# Altium PCB TurboSpin.PcbDoc (part 1 of 3)
Units mm, origin at the board's own origin, x right, y up, seen from the top; angles counter-clockwise.
Board outline 70.29 x 70.31 mm, 4 copper layers (Top Layer, GND, Power, Bottom Layer), stack 0.603 mm thick; 151 components, 101 nets, 536 pads, 784 vias.
Unrouted connection lines stored in the file: 8.
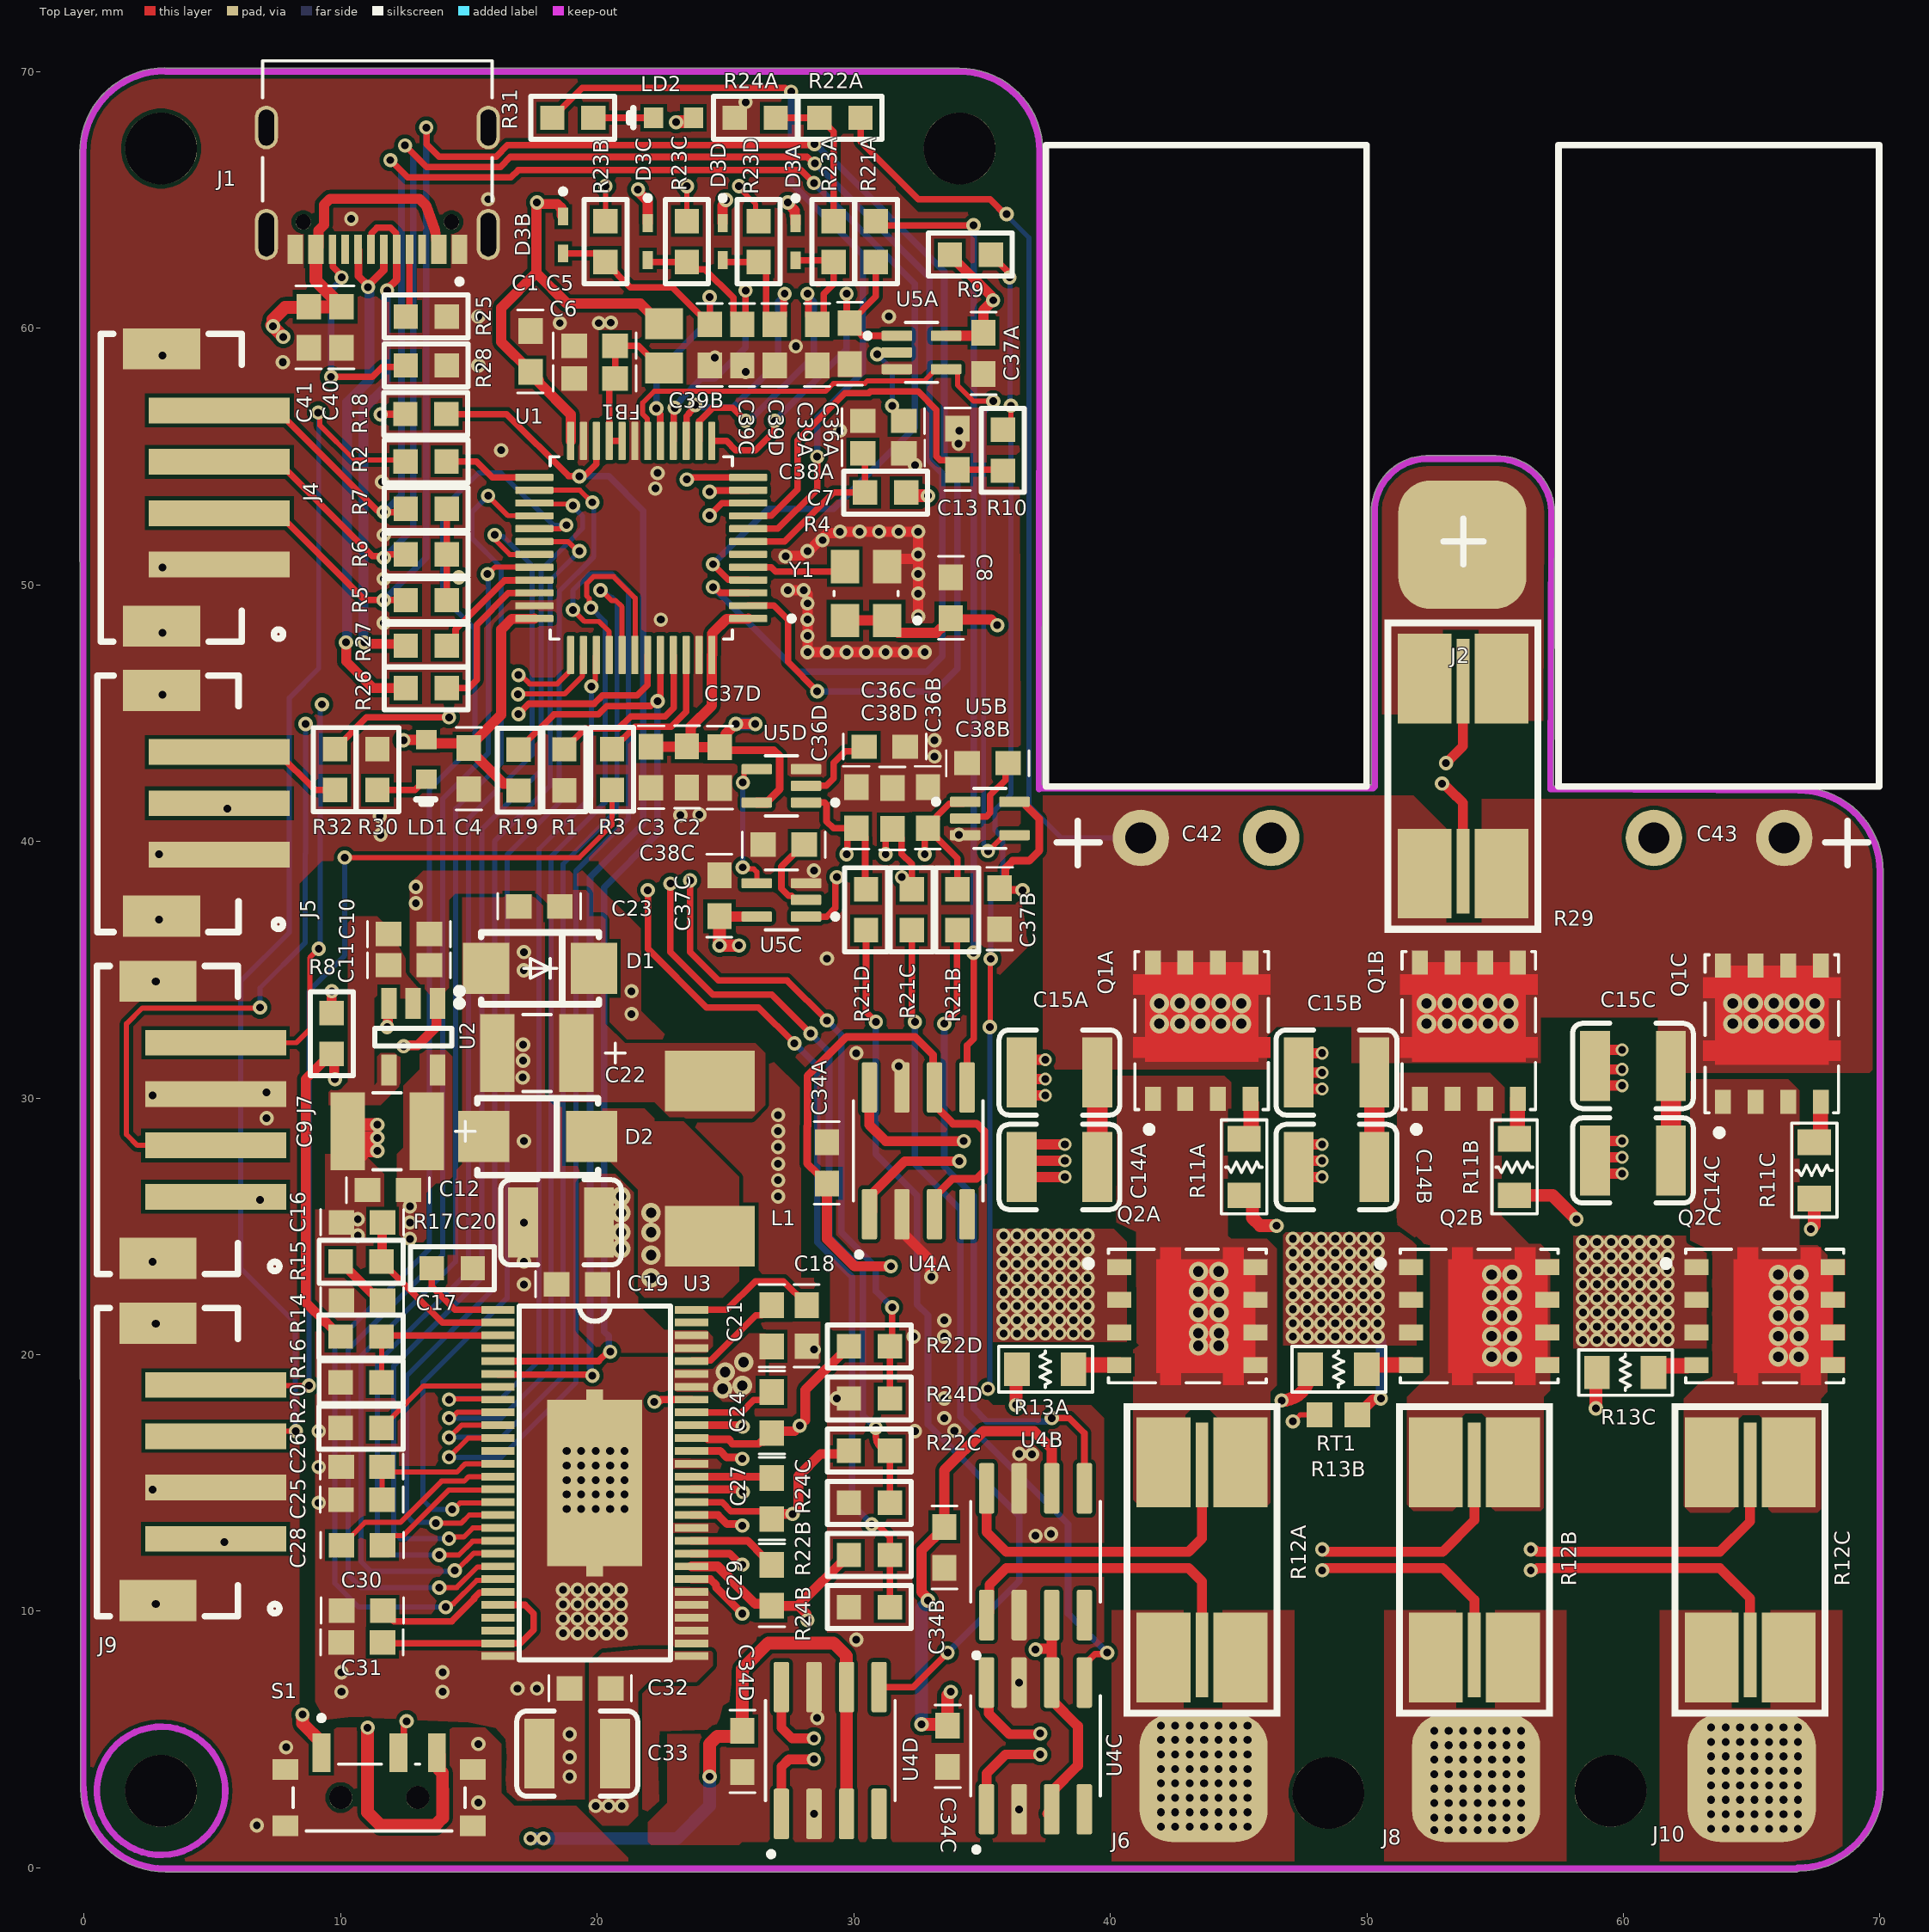
[diagram p0: Top Layer view]
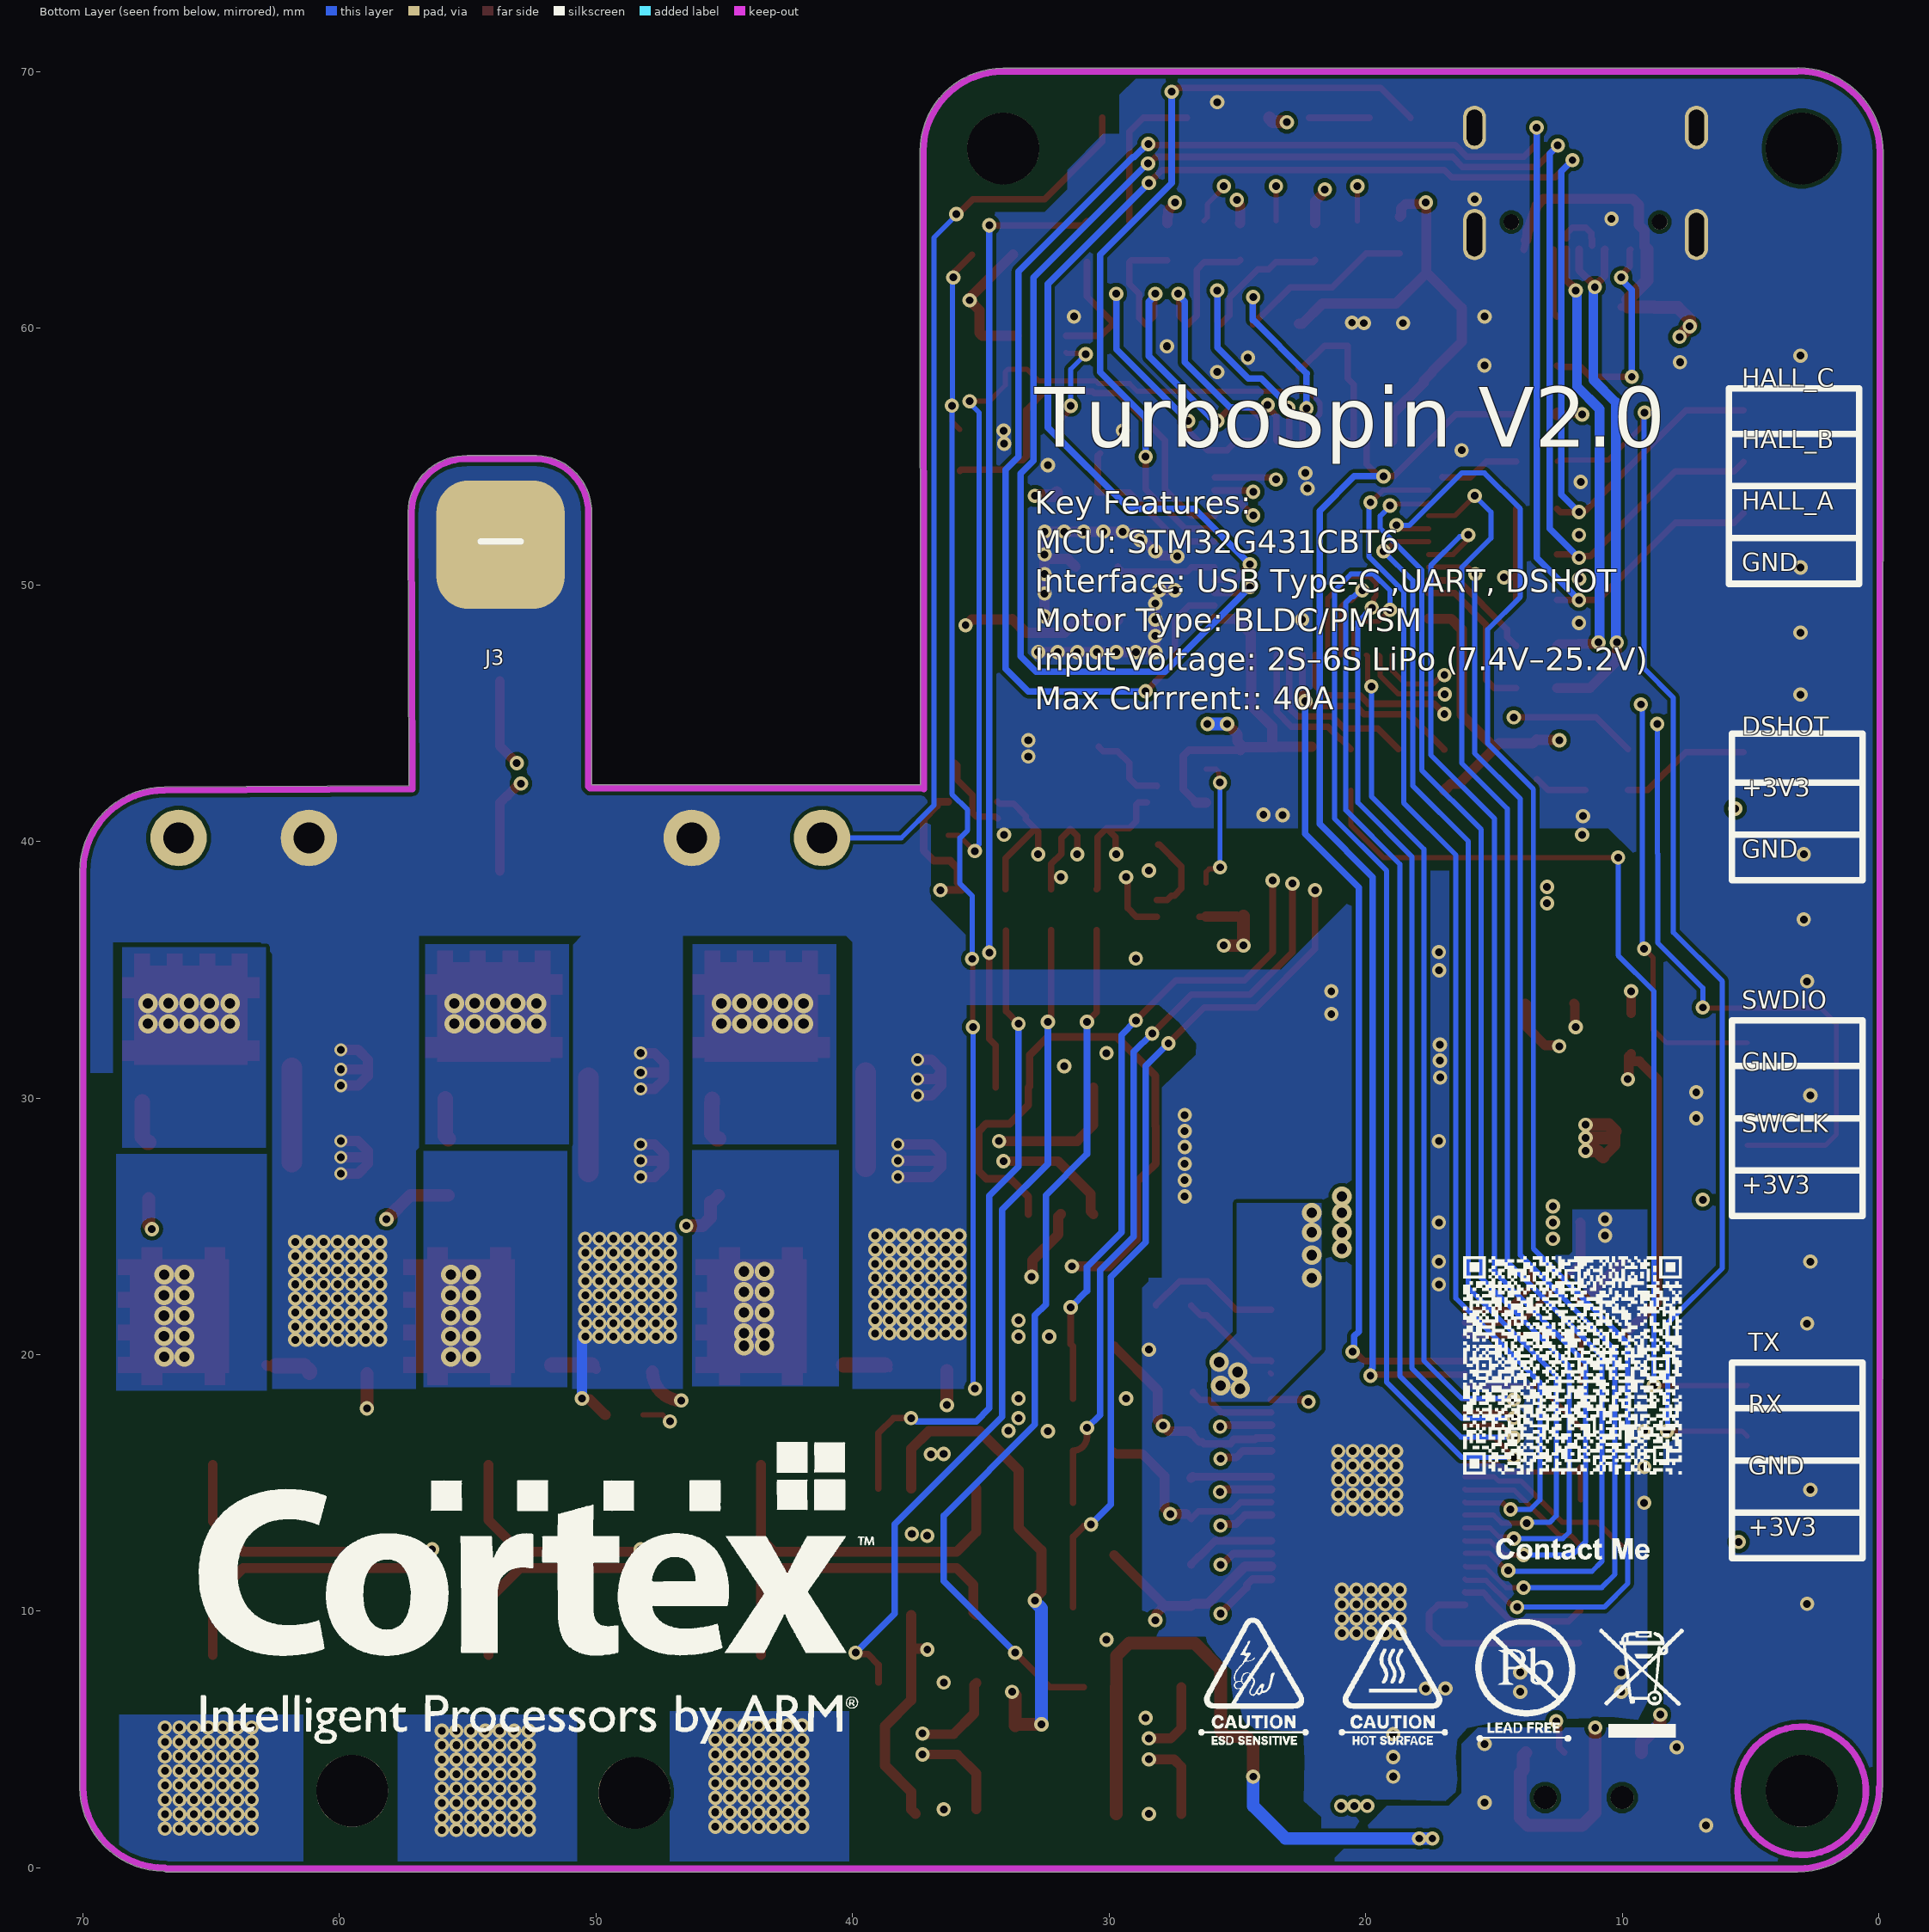
[diagram p1: Bottom Layer view, seen from below]
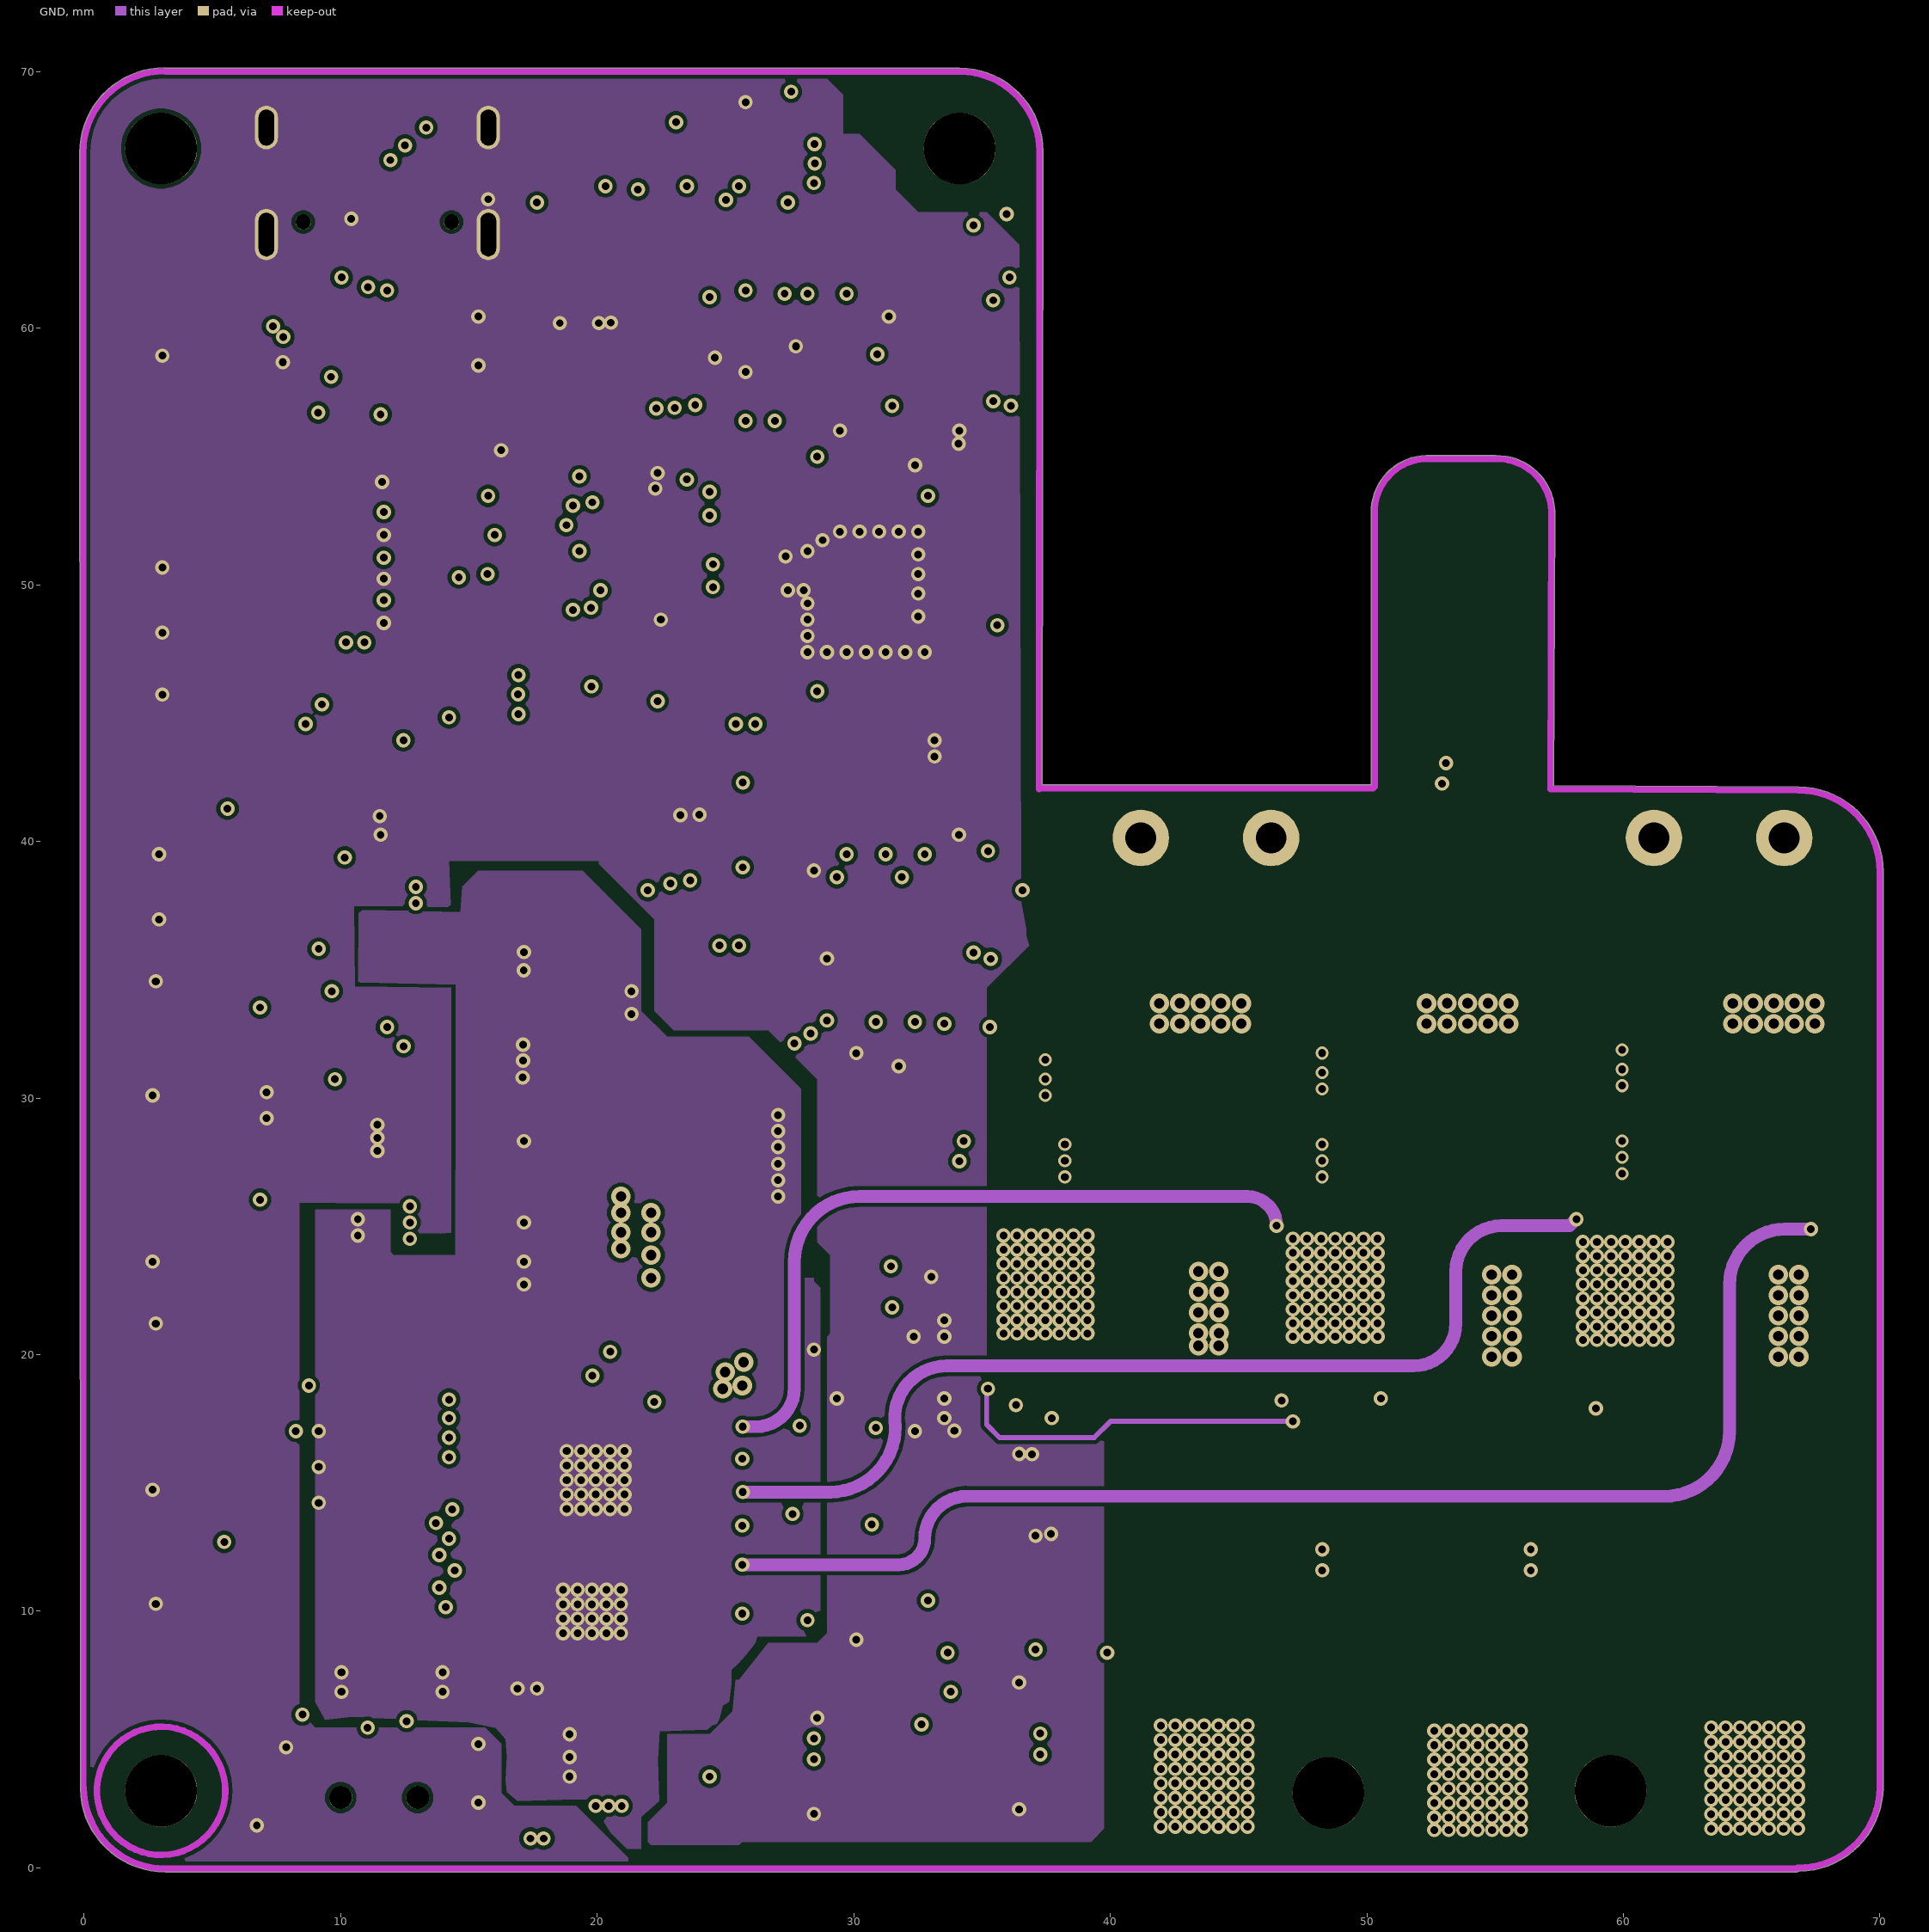
[diagram p2: GND]
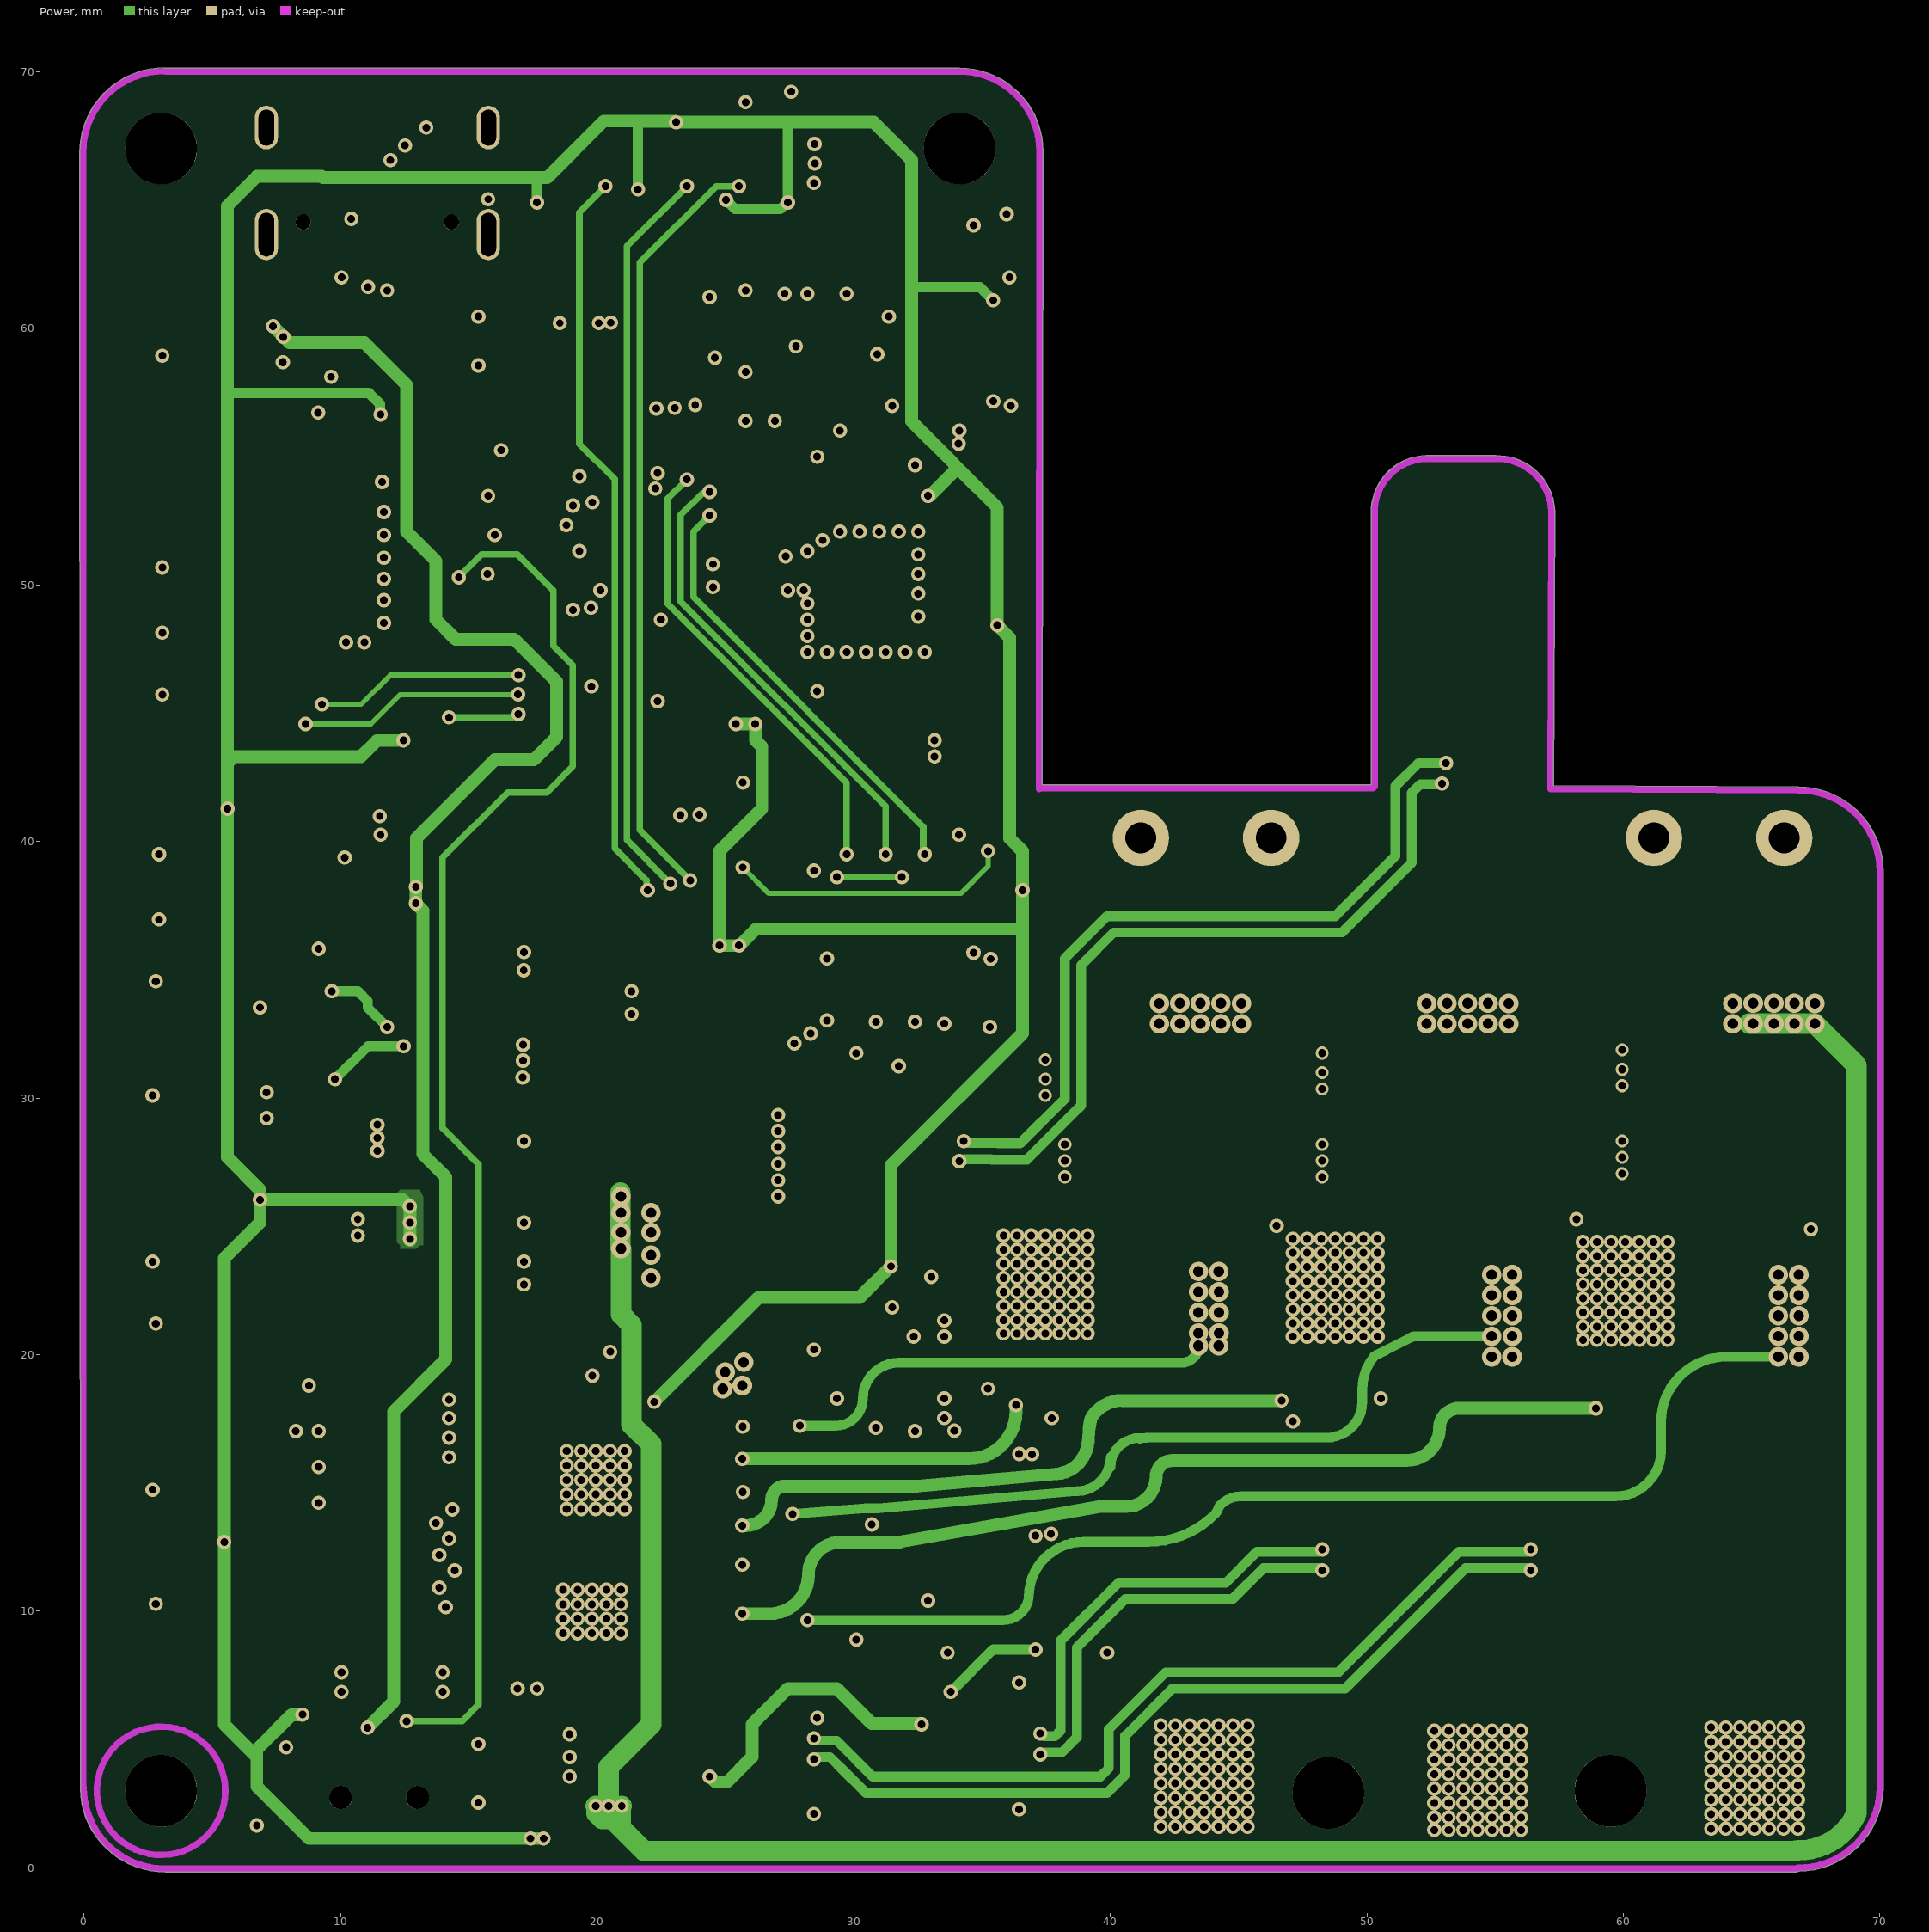
[diagram p3: Power]
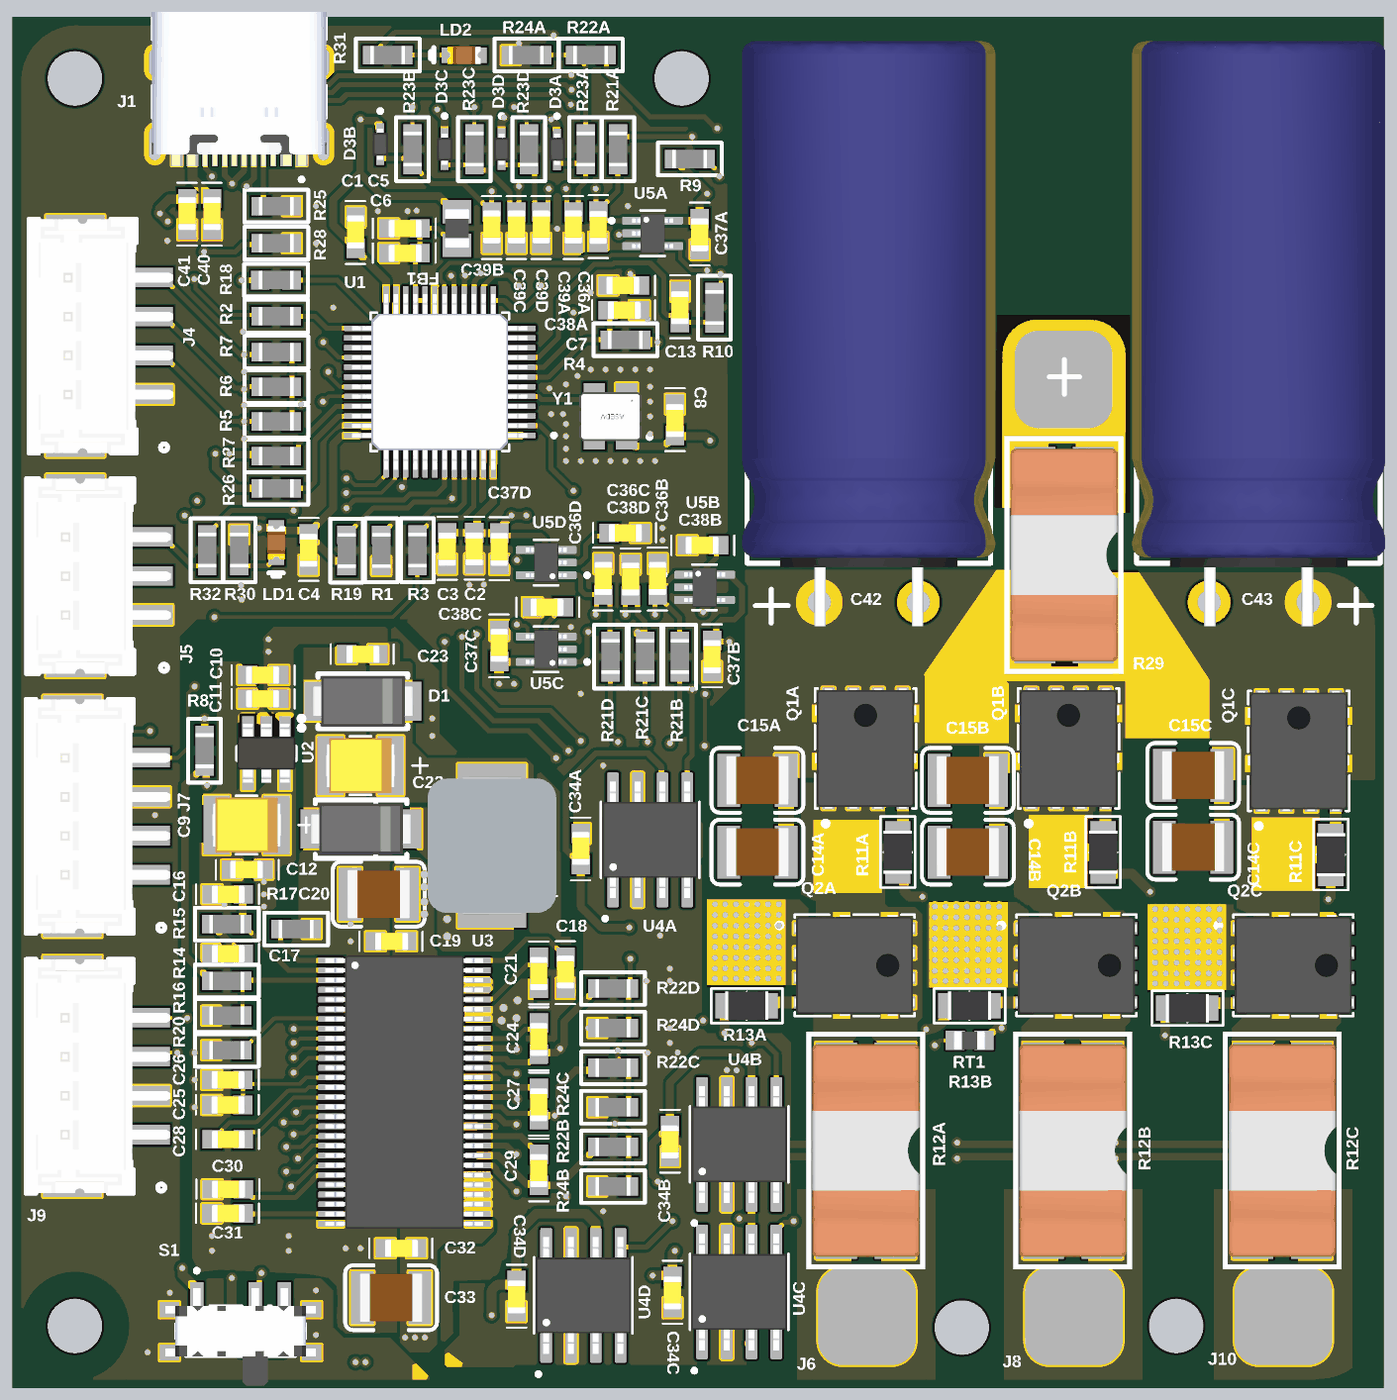
[diagram p5: 3D render of the assembled board from above, using the file's embedded part models]

## Layer stack, top to bottom
Top Solder: solder mask 0.0102, Solder Resist, Dk 3.5
Top Layer: signal copper 0.0356
Dielectric 2: prepreg 0.0711, PP-006, Dk 4.1
GND: signal copper 0.035
Dielectric 1: dielectric 0.32, FR-4, Dk 4.8
Power: signal copper 0.035
Dielectric 3: prepreg 0.0711, PP-006, Dk 4.1
Bottom Layer: signal copper 0.0356
Bottom Solder: solder mask 0.0102, Solder Resist, Dk 3.5

## Board outline
-0.143,3.087 ccw(c3.159,3.139) 3.159,-0.164 66.766,-0.164 66.855,-0.127 ccw(c66.827,3.165) 70.12,3.139 70.12,3.14 70.12,38.802 70.122,38.827 ccw(c66.825,38.823) 66.824,42.12 57.282,42.164 57.325,52.832 57.325,52.835 ccw(c55.076,52.784) 55.026,55.033 52.314,55.038 52.31,55.038 ccw(c52.369,52.843) 50.173,52.786 50.173,42.199 37.345,42.199 37.369,66.888 37.369,66.889 ccw(c34.129,66.889) 34.13,70.129 3.19,70.129 3.132,70.143 ccw(c3.132,66.841) -0.171,66.841

## Design rules (kind name [scope] priority, off if disabled: settings)
Clearance [All] p1: gap=0.152 ignorepadtopadclearanceinfootprint=FALSE
DiffPairsRouting [All] p1: maxlimit=0.254 minlimit=0.254 mostfreqgap=0.254 toplayer_minwidth=0.381 toplayer_maxwidth=0.381 toplayer_prefwidth=0.381 midlayer1_minwidth=0.381 midlayer1_maxwidth=0.381 midlayer1_prefwidth=0.381 midlayer2_minwidth=0.381 midlayer2_maxwidth=0.381 midlayer2_prefwidth=0.381 bottomlayer_minwidth=0.381 bottomlayer_maxwidth=0.381 bottomlayer_prefwidth=0.381 maxuncoupledlength=12.7
PlaneClearance [All] p1: clearance=0.5
PlaneConnect [All] p1: planeconnectstyle=Direct reliefexpansion=0.508 reliefentries=4 reliefconductorwidth=0.254 reliefairgap=0.254
PolygonConnect [All] p1: connectstyle=Direct reliefconductorwidth=0.254 reliefentries=4 polygonreliefangle="90 Angle" airgapwidth=0.254
RoutingVias [All] p1: holewidth=0.3 width=0.56 viastyle="Through Hole" minholewidth=0.3 minwidth=0.56 maxholewidth=3 maxwidth=3
SolderMaskExpansion [All] p1: expansion=0.102 istentingtop=FALSE
SupplyNets "Schematic Supply Nets" [InNet('INA_N')] p1: voltage=0.000
SupplyNets "Schematic Supply Nets_2" [InNet('GND')] p2: voltage=0.000
SupplyNets "Schematic Supply Nets_3" [InNet('+5V')] p3: voltage=0.000
SupplyNets "Schematic Supply Nets_1" [InNet('+3V3')] p4: voltage=0.000
Width [All] p1: maxlimit=4 minlimit=0.2 preferedwidth=0.2
27 further rules are at their usual default settings.

## Classes and differential pairs
channel class Mosfets: U_Mosfets_1 U_Mosfets_2 U_Mosfets_3
component class U_Mosfets_3: C14C C15C Q1C Q2C R11C R12C R13C
component class U_Mosfets_2: C14B C15B Q1B Q2B R11B R12B R13B
component class U_Current_Shunt_Amplifier4: C34D C36D C37D C38D R21D U4D U5D
component class U_Current_Shunt_Amplifier3: C34C C36C C37C C38C R21C U4C U5C
channel class voltage_filter: U_voltage_filter1 U_voltage_filter2 U_voltage_filter3 U_voltage_filter4
channel class Current_Shunt_Amplifier: U_Current_Shunt_Amplifier1 U_Current_Shunt_Amplifier2 U_Current_Shunt_Amplifier3 U_Current_Shunt_Amplifier4
net class WIRE[13..1]: WIRE1 WIRE2 WIRE3 WIRE4 WIRE5 WIRE6 WIRE7 WIRE8 WIRE9 WIRE10 WIRE11 WIRE12 WIRE13
component class U_voltage_filter4: C39D D3D R22D R23D R24D
component class U_voltage_filter3: C39C D3C R22C R23C R24C
component class U_voltage_filter2: C39B D3B R22B R23B R24B
component class U_voltage_filter1: C39A D3A R22A R23A R24A
component class U_USB_TYPE_C: C40 C41 J1 R25 R26 R27 R28
component class "U_Temperature Sensor": C13 R9 R10 RT1
component class U_Mosfets_1: C14A C15A Q1A Q2A R11A R12A R13A
component class U_Mosfet_Driver: C16 C17 C18 C19 C20 C21 C22 C23 C24 C25 C26 C27 C28 C29 C30 C31 C32 C33 D1 D2 L1 R14 R15 R16 R17 R18 R19 R20 U3
component class U_Mcu: C1 C2 C3 C4 C5 C6 C7 C8 FB1 R1 R2 R3 R4 R5 R6 R7 R32 S1 U1 Y1
component class U_Current_Shunt_Amplifier2: C34B C36B C37B C38B R21B U4B U5B
component class U_Current_Shunt_Amplifier1: C34A C36A C37A C38A R21A U4A U5A
component class U_Buck_and_LDO: C9 C10 C11 C12 R8 U2
component class TurboSpin: C42 C43 J2 J3 J4 J5 J6 J7 J8 J9 J10 LD1 LD2 R29 R30 R31
differential pair IND: +IND_P -IND_N
differential pair INC: +INC_P -INC_N
differential pair INB: +INB_P -INB_N
differential pair INA: +INA_P -INA_N
differential pair D: +D_P -D_N

## Components (designator, comment, footprint, x,y, rotation, side; value= is the part's Value field where it differs from the comment)
C1 "100nF 16V 0603 20%" C_0603 17.399,58.293 r90 top
C2 "100nF 16V 0603 20%" C_0603 23.492,43.7 r270 top
C3 "100nF 16V 0603 20%" C_0603 22.098,43.688 r270 top
C4 "100nF 16V 0603 20%" C_0603 14.986,43.637 r270 top
C5 "2.2uF 16V 0603 20%" C_0603 19.101,59.309 r0 top
C6 "100nF 16V 0603 20%" C_0603 19.101,58.039 r0 top
C7 "100nF 16V 0603 20%" C_0603 30.353,55.118 r0 top
C8 "10nF 16V 0603 20%" C_0603 33.782,50.292 r270 top
C9 "100uF 6.3V 3528 10%" CAPPC3528X210N 11.811,28.702 r180 top
C10 "10uF 16V 0603 20%" C_0603 13.463,36.396 r180 top
C11 "100nF 50V 0603 20%" C_0603 13.462,35.179 r180 top
C12 "100nF 16V 0603 20%" C_0603 12.643,26.414 r180 top
C13 "100nF 16V 0603 20%" C_0603 34.036,56.083 r270 top
C14A "4.7uF 100V 1210 20%" C_1210 37.973,27.178 r0 top (schematic designator C14)
C14B "4.7uF 100V 1210 20%" C_1210 48.768,27.178 r0 top (schematic designator C14)
C14C "4.7uF 100V 1210 20%" C_1210 60.325,27.432 r0 top (schematic designator C14)
C15A "4.7uF 100V 1210 20%" C_1210 37.973,30.861 r0 top (schematic designator C15)
C15B "4.7uF 100V 1210 20%" C_1210 48.768,30.861 r0 top (schematic designator C15)
C15C "4.7uF 100V 1210 20%" C_1210 60.325,31.115 r0 top (schematic designator C15)
C16 "120pF 50V 0603 20%" C_0603 10.033,25.146 r0 top
C17 "6.8nF 50V 0603 20%" C_0603 10.033,22.098 r0 top
C18 "15nF 50V 0603 20%" C_0603 28.168,20.324 r90 top
C19 "100nF 100V 0603 20%" C_0603 18.415,22.733 r0 top
C20 "4.7uF 100V 1210 20%" C_1210 18.542,25.019 r0 top
C21 "100nF 50V 0603 20%" C_0603 26.797,21.92 r270 top
C22 "100uF 6.3V 3528 10%" CAPPC3528X210N 17.653,31.75 r180 top
C23 "2.2uF 16V 0603 20%" C_0603 16.942,37.465 r0 top
C24 "100nF 50V 0603 20%" C_0603 26.797,18.542 r270 top
C25 "2.2uF 16V 0603 20%" C_0603 10.017,14.343 r0 top
C26 "2.2uF 16V 0603 20%" C_0603 10.021,15.626 r0 top
C27 "100nF 50V 0603 20%" C_0603 26.797,15.189 r270 top
C28 "22nF 16V 0603 20%" C_0603 10.033,12.573 r0 top
C29 "100nF 50V 0603 20%" C_0603 26.797,11.811 r270 top
C30 "1uF 16V 0603 20%" C_0603 10.043,10.017 r0 top
C31 "1uF 16V 0603 20%" C_0603 10.028,8.777 r0 top
C32 "100nF 100V 0603 20%" C_0603 18.923,6.985 r0 top
C33 "4.7uF 100V 1210 20%" C_1210 19.177,4.318 r0 top
C34A "2.2uF 16V 0603 20%" C_0603 28.956,26.67 r90 top (schematic designator C34)
C34B "2.2uF 16V 0603 20%" C_0603 33.528,13.284 r270 top (schematic designator C34)
C34C "2.2uF 16V 0603 20%" C_0603 33.655,5.537 r270 top (schematic designator C34)
C34D "2.2uF 16V 0603 20%" C_0603 25.654,5.334 r270 top (schematic designator C34)
C36A "1nF 16V 0603 20%" C_0603 29.845,60.198 r270 top (schematic designator C36)
C36B "1nF 16V 0603 20%" C_0603 32.893,40.513 r90 top (schematic designator C36)
C36C "1nF 16V 0603 20%" C_0603 31.514,40.483 r90 top (schematic designator C36)
C36D "1nF 16V 0603 20%" C_0603 30.099,40.513 r90 top (schematic designator C36)
C37A "2.2uF 16V 0603 20%" C_0603 35.052,59.817 r270 top (schematic designator C37)
C37B "2.2uF 16V 0603 20%" C_0603 35.687,38.176 r270 top (schematic designator C37)
C37C "2.2uF 16V 0603 20%" C_0603 24.765,37.084 r90 top (schematic designator C37)
C37D "2.2uF 16V 0603 20%" C_0603 24.771,43.675 r270 top (schematic designator C37)
C38A "15nF 16V 0603 20%" C_0603 31.953,56.388 r180 top (schematic designator C38)
C38B "15nF 16V 0603 20%" C_0603 36.017,43.053 r180 top (schematic designator C38)
C38C "15nF 16V 0603 20%" C_0603 28.067,39.878 r180 top (schematic designator C38)
C38D "15nF 16V 0603 20%" C_0603 30.404,43.688 r0 top (schematic designator C38)
C39A "1nF 16V 0603 20%" C_0603 28.575,58.547 r90 top (schematic designator C39)
C39B "1nF 16V 0603 20%" C_0603 24.384,58.547 r90 top (schematic designator C39)
C39C "1nF 16V 0603 20%" C_0603 25.654,58.547 r90 top (schematic designator C39)
C39D "1nF 16V 0603 20%" C_0603 26.924,58.547 r90 top (schematic designator C39)
C40 "10uF 16V 0603 20%" C_0603 10.033,59.233 r90 top
C41 "100nF 16V 0603 20%" C_0603 8.763,59.233 r90 top
C42 "1000uF 100V 20%" C_RADIAL 43.738,40.135 r0 top
C43 "1000uF 100V 20%" C_RADIAL 63.718,40.135 r180 top
D1 "SMAJ5.0A_C353442" SMAJ5.0A 17.78,35.052 r0 top
D2 "SS36" SS54 17.653,28.321 r0 top
D3A "BAT54K" SODFL1608X70N 27.732,63.365 r270 top (schematic designator D3)
D3B "BAT54K" SODFL1608X70N 18.669,63.627 r270 top (schematic designator D3)
D3C "BAT54K" SODFL1608X70N 21.971,63.373 r270 top (schematic designator D3)
D3D "BAT54K" SODFL1608X70N 24.892,63.373 r270 top (schematic designator D3)
FB1 "MPZ2012S601ATD25" BEADC2012X105N 22.606,59.309 r90 top
J1 "TYPE-C-31-M-12" HRO_TYPE-C-31-M-12 11.43,67.818 r180 top
J2 "Connector>>B1B" CN_1P_PAD#1 53.721,49.099 r0 top
J3 "Connector>>B1B" CN_1P_PAD#2 53.721,51.562 r180 bottom
J4 "Connector>>B5B-XH-A" CN_HDGC2001WV-S-4 4.445,53.721 r0 top
J5 "Connector>>B4B-XH-A" CN_HDGC2001WV-S-3 5.27,41.484 r0 top
J6 "Connector>>B1B" CN_1P_PAD#2 43.635,3.5 r0 top
J7 "Connector>>B5B-XH-A" CN_HDGC2001WV-S-4 4.3,29.083 r0 top
J8 "Connector>>B1B" CN_1P_PAD#2 54.254,3.5 r0 top
J9 "Connector>>B5B-XH-A" CN_HDGC2001WV-S-4 4.3,15.748 r0 top
J10 "Connector>>B1B" CN_1P_PAD#2 65,3.5 r0 top
L1 "22uH 7*6.6mm" Inductor_SMD_7*6.6mm_22uH 24.396,27.639 r90 top
LD1 "1.8Vf  25mA  5mW" LED_0603_red 13.335,43.968 r270 top
LD2 "1.8Vf  25mA  5mW" LED_0603_red 23.749,68.199 r180 top
Q1A "TPH1R204PL1" TRANS_STL60P4LLF6 43.561,32.627 r90 top (schematic designator Q1)
Q1B "TPH1R204PL1" TRANS_STL60P4LLF6 53.975,32.627 r90 top (schematic designator Q1)
Q1C "TPH1R204PL1" TRANS_STL60P4LLF6 65.786,32.5 r90 top (schematic designator Q1)
Q2A "TPH1R204PL1" TRANS_STL60P4LLF6 43,21.5 r0 top (schematic designator Q2)
Q2B "TPH1R204PL1" TRANS_STL60P4LLF6 54.381,21.5 r0 top (schematic designator Q2)
Q2C "TPH1R204PL1" TRANS_STL60P4LLF6 65.508,21.5 r0 top (schematic designator Q2)
R1 "10K 0603 1%" R_0603 18.717,42.79 r270 top
R2 "100R 0603 1%" R_0603 13.327,54.81 r180 top
R3 "100R 0603 1%" R_0603 20.576,42.801 r270 top
R4 "10K 0603 1%" R_0603 31.242,53.594 r180 top
R5 "10K 0603 1%" R_0603 13.335,49.403 r180 top
R6 "10K 0603 1%" R_0603 13.335,51.181 r180 top
R7 "10K 0603 1%" R_0603 13.335,52.959 r180 top
R8 "10K 0603 1%" R_0603 9.652,32.512 r90 top
R9 "10K 0603 1%" R_0603 34.544,62.865 r0 top
R10 "100R 0603 1%" R_0603 35.814,55.245 r270 top
R11A "4.7R 0805 1%" R_0805 45.212,27.305 r90 top (schematic designator R11)
R11B "4.7R 0805 1%" R_0805 55.753,27.305 r90 top (schematic designator R11)
R11C "4.7R 0805 1%" R_0805 67.437,27.178 r90 top (schematic designator R11)
R12A "0.001R 3920 1%" R_3920 43.635,12 r0 top (schematic designator R12)
R12B "0.001R 3920 1%" R_3920 54.254,12 r0 top (schematic designator R12)
R12C "0.001R 3920 1%" R_3920 65,12 r0 top (schematic designator R12)
R13A "4.7R 0805 1%" R_0805 37.465,19.431 r0 top (schematic designator R13)
R13B "4.7R 0805 1%" R_0805 48.895,19.431 r0 top (schematic designator R13)
R13C "4.7R 0805 1%" R_0805 60.071,19.304 r0 top (schematic designator R13)
R14 "52.3K 0603 1%" R_0603 10.795,20.701 r0 top
R15 "16.2K 0603 1%" R_0603 10.795,23.622 r180 top
R16 "10K 0603 1%" R_0603 10.795,18.923 r180 top
R17 "200K 0603 1%" R_0603 14.351,23.368 r180 top
R18 "10K 0603 1%" R_0603 13.321,56.653 r180 top
R19 "10K 0603 1%" R_0603 16.938,42.778 r270 top
R20 "1R 0603 1%" R_0603 10.795,17.145 r0 top
R21A "1K 0603 1%" R_0603 30.861,63.373 r270 top (schematic designator R21)
R21B "1K 0603 1%" R_0603 34.036,37.338 r90 top (schematic designator R21)
R21C "1K 0603 1%" R_0603 32.258,37.338 r90 top (schematic designator R21)
R21D "1K 0603 1%" R_0603 30.48,37.338 r90 top (schematic designator R21)
R22A "120K 0603 1%" R_0603 29.464,68.199 r180 top (schematic designator R22)
R22B "120K 0603 1%" R_0603 30.607,12.192 r0 top (schematic designator R22)
R22C "120K 0603 1%" R_0603 30.607,16.256 r0 top (schematic designator R22)
R22D "120K 0603 1%" R_0603 30.607,20.32 r0 top (schematic designator R22)
R23A "100R 0603 1%" R_0603 29.21,63.373 r270 top (schematic designator R23)
R23B "100R 0603 1%" R_0603 20.32,63.373 r270 top (schematic designator R23)
R23C "100R 0603 1%" R_0603 23.495,63.373 r270 top (schematic designator R23)
R23D "100R 0603 1%" R_0603 26.289,63.373 r270 top (schematic designator R23)
R24A "10K 0603 1%" R_0603 26.162,68.199 r180 top (schematic designator R24)
R24B "10K 0603 1%" R_0603 30.607,10.16 r180 top (schematic designator R24)
R24C "10K 0603 1%" R_0603 30.607,14.224 r180 top (schematic designator R24)
R24D "10K 0603 1%" R_0603 30.607,18.288 r180 top (schematic designator R24)
R25 "5.1K 0603 1%" R_0603 13.335,60.452 r0 top
R26 "22R 0603 1%" R_0603 13.335,45.974 r0 top
R27 "22R 0603 1%" R_0603 13.335,47.625 r0 top
R28 "5.1K 0603 1%" R_0603 13.335,58.547 r0 top
R29 "0.001R 3920 1%" R_3920 53.809,42.545 r0 top
R30 "1K 0603 1%" R_0603 11.43,42.799 r90 top
R31 "1K 0603 1%" R_0603 19.05,68.199 r180 top
R32 "47R 0603 1%" R_0603 9.779,42.799 r90 top
RT1 "NCP18XH103F03RB" THRMC1608X95N 48.895,17.653 r180 top
S1 "SW_SSSS811101" SW_SSSS811101 11.5,2.738 r0 top
U1 "STM32G431CBT6" QFP50P900X900X160-48N 21.717,51.435 r180 top
U2 "RY6212 3V3 SOT23-5" "RY6212 SOT23-5" 12.827,32.385 r270 top
U3 "DRV8301DCAR" TSSOP-56_3 19.904,14.998 r0 top
U4A "INA240A1D" SOIC127P599X175-8N 32.512,27.94 r90 top (schematic designator U4)
U4B "INA240A1D" SOIC127P599X175-8N 37.084,12.319 r90 top (schematic designator U4)
U4C "INA240A1D" SOIC127P599X175-8N 37.081,4.751 r90 top (schematic designator U4)
U4D "INA240A1D" SOIC127P599X175-8N 29.083,4.572 r90 top (schematic designator U4)
U5A "SW>>SN74LVC1G66DCKR" SOT65P210X110-5N 32.639,59.055 r0 top (schematic designator U5)
U5B "SW>>SN74LVC1G66DCKR" SOT65P210X110-5N 35.306,40.894 r0 top (schematic designator U5)
U5C "SW>>SN74LVC1G66DCKR" SOT65P210X110-5N 27.178,37.719 r180 top (schematic designator U5)
U5D "SW>>SN74LVC1G66DCKR" SOT65P210X110-5N 27.178,42.164 r180 top (schematic designator U5)
Y1 "8Mhz Oscillator (TFOM8M4RHKCNT2T)" XTAL_ASE-8.000MHZ-LC-T 30.48,49.657 r180 top

## Footprints (in the part's own frame and the unit in brackets; to place one, negate y for a bottom-side part, rotate by r counter-clockwise, add the part's x,y. Pads: shape width x height; smd on the part's side, far side on the other; paste and mask are expansions set on the pad)
BEADC2012X105N [mm]
  rect 1.2x1.47 smd: 1(-0.86,0) 2(0.86,0)
  body extent -1,-0.63 1,0.63, height 1.05
C_0603 [mm]
  rect 1x0.95 smd: 1(0,0) 2(1.6,0)
  silkscreen extent -0.81,-0.49 2.41,0.51, body extent -0.01,-0.45 1.69,0.45, height 0.8
C_1210 [mm]
  rect 1.16x2.72 smd: 1(-1.431,0.134) 2(1.519,0.134)
  silkscreen extent -2.31,-1.53 2.4,1.79, body extent -1.56,-1.12 1.64,1.38, height 1.3
C_RADIAL [mm]
  round 2.2 hole 1.2: 1(-2.55,0) 2(2.53,0)
  silkscreen extent -6.25,-1.07 6.25,27, body extent -6.51,-1.22 6.49,28.78, height 6.5
CAPPC3528X210N [mm]
  rect 1.34x3.02 smd paste+0 mask+0.102: 1(-1.54,0) 2(1.54,0)
  silkscreen extent -3.43,-1.5 0.55,1.5, body extent -1.75,-1.4 1.75,1.4, height 2.1
CN_1P_PAD#1 [mm]
  rrect50% 5x5 smd: 1(0,2.463)
CN_1P_PAD#2 [mm]
  rrect50% 5x5 smd: 1(0,0)
CN_HDGC2001WV-S-3 [mm]
  rect 5.5x1 smd: 1(0,-2) 2(0,0) 3(0,2)
  rect 3x1.6 smd: 4(-2.25,-4.4) 4(-2.25,4.4)
  silkscreen extent -4.75,-5.02 2.48,4.98, body extent -4.75,-5.02 2.65,4.98, height 6.5
CN_HDGC2001WV-S-4 [mm]
  rect 5.5x1 smd: 1(0.826,-2.93) 2(0.826,-0.93) 3(0.826,1.07) 4(0.826,3.07)
  rect 3x1.6 smd: 5(-1.424,-5.33) 5(-1.424,5.47)
  silkscreen extent -3.8,-5.94 3.31,6.06, body extent -3.8,-5.94 3.6,6.06, height 6.5
HRO_TYPE-C-31-M-12 [mm]
  rect 0.6x1.14 smd mask+0.05: A1_B12(-3.2,4.75) A4_B9(-2.4,4.75) B1_A12(3.2,4.75) B4_A9(2.4,4.75)
  rect 0.3x1.14 smd mask+0.05: A5(-1.25,4.75) A6(-0.25,4.75) A7(0.25,4.75) A8(1.25,4.75) B5(1.75,4.75) B6(0.75,4.75) B7(-0.75,4.75) B8(-1.75,4.75)
  oval 0.9x2 hole 0.6 slot 1.7 at 90 deg: S1(-4.325,4.17) S2(4.325,4.17)
  oval 0.9x1.7 hole 0.6 slot 1.4 at 90 deg: S3(-4.325,0) S4(4.325,0)
  round 0.6 hole 0.6 unplated: ""(-2.89,3.68) ""(2.89,3.68)
  silkscreen extent -4.47,-2.6 4.47,6.1, body extent -4.47,-2.6 4.47,5.31, height 3.31
Inductor_SMD_7*6.6mm_22uH [mm] "Inductor CD31-4R7M"
  rect 2.35x3.5 smd: 1(-3.025,0) 2(3.025,0)
  body extent -3.55,-3.3 3.55,3.3, height 3
LED_0603_red [mm]
  rect 0.75x0.8 smd: 1(0,0) 2(1.55,0)
  silkscreen extent 2.34,-0.38 2.5,0.36, body extent -0.06,-0.45 1.64,0.45, height 0.9
QFP50P900X900X160-48N [mm]
  rrect25% 1.49x0.28 smd: 1(-4.17,2.75) 2(-4.17,2.25) 3(-4.17,1.75) 4(-4.17,1.25) 5(-4.17,0.75) 6(-4.17,0.25) 7(-4.17,-0.25) 8(-4.17,-0.75) 9(-4.17,-1.25) 10(-4.17,-1.75) 11(-4.17,-2.25) 12(-4.17,-2.75) 25(4.17,-2.75) 26(4.17,-2.25) 27(4.17,-1.75) 28(4.17,-1.25) 29(4.17,-0.75) 30(4.17,-0.25) 31(4.17,0.25) 32(4.17,0.75) 33(4.17,1.25) 34(4.17,1.75) 35(4.17,2.25) 36(4.17,2.75)
  rrect25% 0.28x1.49 smd: 13(-2.75,-4.17) 14(-2.25,-4.17) 15(-1.75,-4.17) 16(-1.25,-4.17) 17(-0.75,-4.17) 18(-0.25,-4.17) 19(0.25,-4.17) 20(0.75,-4.17) 21(1.25,-4.17) 22(1.75,-4.17) 23(2.25,-4.17) 24(2.75,-4.17) 37(2.75,4.17) 38(2.25,4.17) 39(1.75,4.17) 40(1.25,4.17) 41(0.75,4.17) 42(0.25,4.17) 43(-0.25,4.17) 44(-0.75,4.17) 45(-1.25,4.17) 46(-1.75,4.17) 47(-2.25,4.17) 48(-2.75,4.17)
  silkscreen extent -5.96,-3.55 3.55,3.55, body extent -4.5,-4.5 4.5,4.5, height 1.63
R_0603 [mm] "Chip Resistor, 2-Leads, Body 1.65x0.85mm, IPC Medium Density"
  rect 0.95x0.95 smd: 1(-0.8,0) 2(0.8,0)
  silkscreen extent -1.64,-0.84 1.63,0.84, body extent -0.89,-0.47 0.89,0.47, height 0.45
R_0805 [mm]
  rect 1x1.3 smd: 1(-1.1,0) 2(1.1,0)
  silkscreen extent -1.82,-0.89 1.84,0.88, body extent -1.1,-0.72 1.1,0.73, height 0.65
R_3920 [mm]
  rect 2.1x3.5 smd: 1(-1.563,-3.8) 1(1.436,-3.8) 2(-1.563,3.8) 2(1.436,3.8)
  rect 0.5x3.3 smd: 1(-0.064,-3.7) 2(-0.064,3.7)
  silkscreen extent -3.11,-6.1 2.98,6.1, body extent -2.81,-5.46 2.71,5.46, height 2
"RY6212 SOT23-5" [mm] "RY8310 is a high frequency, synchronous, rectified, step-down, switch-mode converter"
  rect 1.2x0.6 smd mask+0.2: 1(-1.3,0.95) 2(-1.3,0) 3(-1.3,-0.95)
  rect 1.2x0.6 smd: 4(1.3,-0.95) 6(1.3,0.95)
  silkscreen extent -1.9,-1.5 0.36,1.93, body extent -1.5,-1.5 1.5,1.5, height 1.45
SMAJ5.0A [mm]
  rect 1.8x2 smd: 1(2.092,0) 2(-2.108,0)
  silkscreen extent -2.31,-1.4 2.29,1.4, body extent -2.6,-1.3 2.6,1.3, height 2.4
SODFL1608X70N [mm]
  rect 0.69x0.4 smd: 1(0.72,0) 2(-0.72,0)
  silkscreen extent -1.8,-0.1 -1.6,0.1, body extent -0.8,-0.4 0.8,0.4, height 0.7
SOIC127P599X175-8N [mm]
  rrect25% 1.97x0.6 smd: 1(-2.47,1.905) 2(-2.47,0.635) 3(-2.47,-0.635) 4(-2.47,-1.905) 5(2.47,-1.905) 6(2.47,-0.635) 7(2.47,0.635) 8(2.47,1.905)
  silkscreen extent -4.14,-2.52 1.95,2.52, body extent -3,-2.45 3,2.45, height 1.75
SOT65P210X110-5N [mm]
  rrect25% 1.19x0.4 smd paste+0 mask+0: 1(-0.96,0.65) 2(-0.96,0) 3(-0.96,-0.65) 4(0.96,-0.65) 5(0.96,0.65)
  silkscreen extent -2.2,-1.17 0.63,1.17, body extent -1.05,-1 1.05,1, height 1.1
SS54 [mm]
  rect 2x2 smd: 1(-2.075,0.175) 2(2.125,0.175)
  silkscreen extent -2.33,-1.33 2.37,1.67, body extent -2.57,-1.13 2.63,1.47, height 2.4
SW_SSSS811101 [mm]
  rect 0.7x1.5 smd: 1(-2.25,1.75) 2(0.75,1.75) 3(2.25,1.75)
  rect 1x0.8 smd: SH(-3.65,-1.1) SH(-3.65,1.1) SH(3.65,-1.1) SH(3.65,1.1)
  round 0.9 hole 0.9 unplated: ""(-1.5,0) ""(1.5,0)
  silkscreen extent -3.35,-1.3 3.35,3.2, body extent -3.85,-2.8 3.85,2.2, height 1.4
THRMC1608X95N [mm]
  rect 1x0.97 smd: 1(-0.735,0) 2(0.735,0)
  body extent -0.8,-0.47 0.8,0.48, height 0.8
TRANS_STL60P4LLF6 [mm]
  rect 0.94x0.62 smd: 1(-2.655,1.905) 2(-2.655,0.635) 3(-2.655,-0.635) 4(-2.655,-1.905) 5(2.655,-1.905) 6(2.655,-0.635) 7(2.655,0.635) 8(2.655,1.905)
  Top Layer region: 2.195,2.205 3.12,2.205 3.12,1.6 2.655,1.6 2.655,0.94 3.12,0.94 3.12,0.33 2.655,0.33 2.655,-0.33 3.12,-0.33 3.12,-0.94 2.655,-0.94 2.655,-1.6 3.12,-1.6 3.12,-2.205 2.195,-2.205 2.195,-2.675 1.395,-2.675 1.395,-2.205 -0.255,-2.205 -0.255,-2.675 -1.055,-2.675 -1.055,-2.205 -1.205,-2.205 -1.205,2.205 -1.055,2.205 -1.055,2.675 -0.255,2.675 -0.255,2.205 1.395,2.205 1.395,2.675 2.195,2.675
  silkscreen extent -3.95,-2.6 3.08,2.6, body extent -3.08,-2.6 3.08,2.6, height 1
TSSOP-56_3 [mm]
  rect 1.3x0.3 smd: 1(-3.775,6.75) 2(-3.775,6.25) 3(-3.775,5.75) 4(-3.775,5.25) 5(-3.775,4.75) 6(-3.775,4.25) 7(-3.775,3.75) 8(-3.775,3.25) 9(-3.775,2.75) 10(-3.775,2.25) 11(-3.775,1.75) 12(-3.775,1.25) 13(-3.775,0.75) 14(-3.775,0.25) 15(-3.775,-0.25) 16(-3.775,-0.75) 17(-3.775,-1.25) 18(-3.775,-1.75) 19(-3.775,-2.25) 20(-3.775,-2.75) 21(-3.775,-3.25) 22(-3.775,-3.75) 23(-3.775,-4.25) 24(-3.775,-4.75) 25(-3.775,-5.25) 26(-3.775,-5.75) 27(-3.775,-6.25) 28(-3.775,-6.75) 29(3.775,-6.75) 30(3.775,-6.25) 31(3.775,-5.75) 32(3.775,-5.25) 33(3.775,-4.75) 34(3.775,-4.25) 35(3.775,-3.75) 36(3.775,-3.25) 37(3.775,-2.75) 38(3.775,-2.25) 39(3.775,-1.75) 40(3.775,-1.25) 41(3.775,-0.75) 42(3.775,-0.25) 43(3.775,0.25) 44(3.775,0.75) 45(3.775,1.25) 46(3.775,1.75) 47(3.775,2.25) 48(3.775,2.75) 49(3.775,3.25) 50(3.775,3.75) 51(3.775,4.25) 52(3.775,4.75) 53(3.775,5.25) 54(3.775,5.75) 55(3.775,6.25) 56(3.775,6.75)
  rect 0.65x0.4 smd: 57(0,-3.45) 57(0,3.45)
  rect 3.7x6.5 smd: 57(0,0)
  silkscreen extent -2.95,-6.9 2.95,6.9, body extent -4.05,-7 4.05,7, height 1.2
XTAL_ASE-8.000MHZ-LC-T [mm]
  rect 1.1x1.3 smd: 1(-0.825,1.05) 2(-0.825,-1.05) 3(0.825,-1.05) 4(0.825,1.05)
  silkscreen extent -2.1,-0.08 1.25,1.15, body extent -1.6,-1.25 1.6,1.25, height 1.2

## Part data
C1 C2 C3 C4 C5 C6 C7 C8 C10 C11 C12 C13 C14A C14B C14C C15A C15B C15C C16 C17 C18 C19 C20 C21 C23 C24 C25 C26 C27 C28 C29 C30 C31 C32 C33 C34A C34B C34C C34D C36A C36B C36C C36D C37A C37B C37C C37D C38A C38B C38C C38D C39A C39B C39C C39D C40 C41: library part "Capacitor>> Non-Polar", "CAP  0603 20%"
C9 C22 C42 C43: library part "Capacitor>> Polar"
D1: BOM_Manufacturer="Shandong Jingdao Microelectronics", BOM_Manufacturer Part=SMAJ5.0A, BOM_Supplier=LCSC, BOM_Supplier Part=C353442, Contributor=LCSC, spicePre=D, spiceSymbolName=SMAJ5.0A_C353442
D2 D3A D3B D3C D3D: library part Diode>>SCHOTTKEY
FB1: library part FB>>MPZ2012S601ATD25, "600 Ohms @ 100MHz 1 Power Line Ferrite Bead 0805 (2012 Metric) 2A 100mOhm", Package="0805 TDK", Availability=Warning, Check_prices=https://www.snapeda.com/parts/MPZ2012S601ATD25/TDK-Lambda%20Americas%20Inc/view-part/347055/?ref=eda, MF=TDK, MP=MPZ2012S601ATD25, Price=None, Purchase-URL=https://pricing.snapeda.com/search/part/MPZ2012S601ATD25/?ref=eda, SnapEDA_Link=https://www.snapeda.com/parts/MPZ2012S601ATD25/TDK-Lambda%20Americas%20Inc/view-part/347055/?ref=snap
J1: "USB Connectors 24 Receptacle 1 8.94*7.3mm RoHS", Package=Package, Check_prices=https://www.snapeda.com/parts/TYPE-C-31-M-12/HRO+Electronics+Co.%252C+Ltd./view-part/?ref=eda, MF="HRO Electronics Co., Ltd.", MP=TYPE-C-31-M-12, SnapEDA_Link=https://www.snapeda.com/parts/TYPE-C-31-M-12/HRO+Electronics+Co.%252C+Ltd./view-part/?ref=snap
J2 J3 J4 J5 J6 J7 J8 J9 J10: "Connector Header Through Hole 5 position 0.098 (2.50mm)", Package=None, Check_prices=https://www.snapeda.com/parts/B5B-XH-A/JST+Sales+America+Inc./view-part/?ref=eda, MF="JST Sales", MP=B5B-XH-A, SnapEDA_Link=https://www.snapeda.com/parts/B5B-XH-A/JST+Sales+America+Inc./view-part/?ref=snap
L1: library part "Inductor>> General Purpose"
LD1 LD2: library part "LED>> General Purpose"
Q1A Q1B Q1C Q2A Q2B Q2C: library part MOSFET_N>>ST130N6F7, "N-channel 60 V, 3 mOhm typ., 130 A STripFET F7 Power MOSFET in a PowerFLAT 5x6 package", ComponentLink1Description=Datasheet, ComponentLink1URL=https://www.st.com/en/power-transistors/stl130n6f7.html#st_description_sec-nav-tab
R1 R2 R3 R4 R5 R6 R7 R8 R9 R10 R11A R11B R11C R12A R12B R12C R13A R13B R13C R14 R15 R16 R17 R18 R19 R20 R21A R21B R21C R21D R22A R22B R22C R22D R23A R23B R23C R23D R24A R24B R24C R24D R25 R26 R27 R28 R29 R30 R31 R32: library part "Resistor>> General Purpose", "RES 0603 20%"
RT1: "NTC Thermistor 10k 0603 (1608 Metric)", Package=None, Availability=Unavailable, MP=NCP18XH103F03RB, Price=None
S1: "Switch Slide SP Side Slide 0.3A 5VDC 10000Cycles Gull Wing SMD T/R", Package=None, Check_prices=https://www.snapeda.com/parts/SSSS811101/ALPS/view-part/?ref=eda, MF=ALPS, MP=SSSS811101, SnapEDA_Link=https://www.snapeda.com/parts/SSSS811101/ALPS/view-part/?ref=snap
U2: "The RY6212 highly accurate, low noise, CMOS LDO Voltage Regulators."
U3: "Motor Driver Power MOSFET Parallel 56-HTSSOP", Package="HTSSOP-56 Texas Instruments", Digi-Key_Part_Number=296-29544-1-ND, Digi-Key_Purchase_URL=https://www.digikey.com/product-detail/en/texas-instruments/DRV8302DCAR/296-29544-1-ND/2753591?utm_source=snapeda&utm_medium=aggregator&utm_campaign=symbol, MF="Texas Instruments", MP=DRV8302DCAR, SnapEDA_Link=https://www.snapeda.com/parts/DRV8302DCAR/Texas%20Instruments/view-part/46250/?ref=snap
U4A U4B U4C U4D: "-4 to 80V, bidirectional, ultra-precise current sense amplifier with enhanced PWM rejection", Package="SOIC-8 Texas Instruments", Check_prices=https://www.snapeda.com/parts/INA240A1D/Texas+Instruments/view-part/?ref=eda, MF="Texas Instruments", MP=INA240A1D, SnapEDA_Link=https://www.snapeda.com/parts/INA240A1D/Texas+Instruments/view-part/?ref=snap
U5A U5B U5C U5D: "5-V, 1:1 (SPST), 1-channel analog switch", Package="SC70-5 Texas Instruments", Check_prices=https://www.snapeda.com/parts/SN74LVC1G66DCKR/Texas+Instruments/view-part/?ref=eda, MF="Texas Instruments", MP=SN74LVC1G66DCKR, SnapEDA_Link=https://www.snapeda.com/parts/SN74LVC1G66DCKR/Texas+Instruments/view-part/?ref=snap
Y1: library part Osc>>ASE-8.000MHZ-LC-T, "8 MHz XO (Standard) CMOS Oscillator 3.3V Enable/Disable 4-SMD, No Lead", Package="SMD-4 Abracon LLC", Availability="In Stock", Check_prices=https://www.snapeda.com/parts/ASE-8.000MHZ-LC-T/Abracon+LLC/view-part/?ref=eda, MF="Abracon LLC", MP=ASE-8.000MHZ-LC-T, Price=None, Purchase-URL=https://pricing.snapeda.com/search/part/ASE-8.000MHZ-LC-T/?ref=eda, SnapEDA_Link=https://www.snapeda.com/parts/ASE-8.000MHZ-LC-T/Abracon+LLC/view-part/?ref=snap

## Free pads (board coordinates)
  round 2.8 hole 2.8 unplated: 0(3,3) 0(3,67) 0(34.127,67) 0(48.5,2.921) 0(59.5,3)

## Via types
v1: diameter 0.559, hole 0.305, Top Layer to Bottom Layer, tented both sides, 440 vias
v2: diameter 0.56, hole 0.3, Top Layer to Bottom Layer, tented both sides, 254 vias
v3: diameter 0.762, hole 0.406, Top Layer to Bottom Layer, tented both sides, 72 vias
v4: diameter 0.508, hole 0.305, Top Layer to Bottom Layer, tented both sides, 18 vias

## Nets (pads, with @x,y where several pads share a name; then routed paths per layer and width w, separated by ;. In a path a pad name is that pad's centre, name@x,y a point inside that pad or via, vN(x,y) a via of type N, cw(c..) or ccw(c..) an arc to the next point about the centre after c; other vN are vias at no path point)
+3V3: C1.1 C2.1 C3.1 C4.1 C8.2 C9.1 C12.1 C34A.1 C34B.1 C34C.1 C34D.1 C37A.1 C37B.1 C37C.1 C37D.1 D3A.2 D3B.2 D3C.2 D3D.2 FB1.2 J5.2 J7.1 J9.1 LD1.1 LD2.1 R4.1 R9.1 R18.2 R19.2 S1.1 U1.1 U1.24 U1.36 U1.48 U2.6 U3.49 U4A.3 U4A.6 U4B.3 U4B.6 U4C.3 U4C.6 U4D.3 U4D.6 U5A.5 U5B.5 U5C.5 U5D.5 Y1.1 Y1.4 | length 392
  Top Layer w0.254: C37C.1@25.019,37.084 C37C.1@25.034,37.069 ; U5C.5@26.218,37.069 U5C.5@26.472,37.069 ; v2(32.639,5.588) v2@32.698,5.529
  Top Layer w0.3: v2@11.562,56.647 R18.2@12.516,56.647 ; v2(22.225,18.161) 22.275,18.211 22.459,18.211 22.496,18.248 U3.49@23.091,18.248 ; U3.49@23.091,18.248 U3.49@23.679,18.248 ; C37D.1@24.885,43.561 26.875,43.561 27.115,43.321 27.115,42.043 U5D.5@26.663,41.591 ; C34A.1@28.956,26.67 28.956,26.695 28.631,27.02 28.606,27.02 28.179,27.447 28.179,28.895 28.194,28.91 28.194,30.861 29.718,32.385 32.385,32.385 33.097,31.673 33.097,30.46 U4A.6@33.147,30.41 33.147,29.725 33.869,29.003 34.788,29.003 35.08,28.71 35.08,27.15 34.788,26.857 33.849,26.857 33.147,26.155 U4A.3@33.147,25.47 ; U5B.5@36.266,41.544 36.661,41.544 36.711,41.494 36.711,41.394 37.234,40.871 37.234,39.647 36.83,39.243 36.195,39.243 35.912,38.96 35.912,38.401 C37B.1@35.687,38.176 35.752,38.111 36.565,38.111 v2(36.576,38.1)
  Top Layer w0.4: v2(12.446,43.942) 12.457,43.953 13.32,43.953 LD1.1@13.335,43.968 13.488,43.815 14.808,43.815 C4.1@14.986,43.637 ; C4.1@14.986,43.612 16.345,42.253 16.663,42.253 R19.2@16.938,41.978 ; C4.1@14.986,43.662 16.256,44.932 16.256,48.26 16.668,48.672 17.534,48.672 U1.36@17.547,48.685 ; 17.634,62.102 17.634,62.144 ; D3B.2@18.669,64.347 18.619,64.397 18.619,64.663 18.443,64.838 17.782,64.838 17.723,64.897 v2(17.653,64.897) 17.634,64.878 17.634,62.169 ; U1.24@18.967,55.605 18.967,56.638 17.724,57.881 17.724,57.968 C1.1@17.399,58.293 17.399,58.318 16.256,59.461 16.256,60.791 17.634,62.169 ; v2(21.59,65.405) 21.59,65.322 21.971,64.941 D3C.2@21.971,64.093 ; C3.1@22.098,43.688 23.48,43.688 23.494,43.675 C37D.1@24.771,43.675 ; FB1.2@22.606,60.169 22.471,60.169 21.68,60.96 18.818,60.96 17.634,62.144 ; C2.1@23.492,43.7 23.646,43.854 23.646,44.474 24.467,45.295 U1.48@24.467,47.265 24.48,47.278 24.48,48.102 25.05,48.672 25.874,48.672 U1.1@25.887,48.685 ; C37D.1@24.885,43.561 C37D.1@24.771,43.675 ; D3D.2@24.892,64.093 24.888,64.097 24.888,64.786 25.019,64.917 v2(25.019,65) ; C37C.1@25.034,37.069 U5C.5@26.218,37.069 ; v2@25.389,44.566 24.996,44.173 24.996,43.9 C37D.1@24.771,43.675 ; v2(25.4,44.577) v2(26.162,44.577) ; U5D.5@26.218,41.514 U5D.5@26.613,41.514 ; v2(27.432,64.897) 27.432,64.854 27.697,64.588 27.697,64.382 27.732,64.347 D3A.2@27.732,64.085 ; C34A.1@28.956,26.67 28.956,24.511 30.026,23.441 v2(31.447,23.441) ; Y1.4@29.655,48.607 Y1.1@31.305,48.607 31.305,48.556 31.728,48.133 33.223,48.133 33.409,48.319 33.434,48.319 33.782,48.667 33.797,48.652 35.348,48.652 35.578,48.423 v2(35.594,48.423) ; v2(32.893,10.414) 32.893,10.497 32.639,10.751 32.639,12.37 33.528,13.259 C34B.1@33.528,13.284 33.528,15.494 35.052,17.018 37.024,17.018 37.719,16.323 U4B.6@37.719,14.789 ; U5A.5@33.599,59.705 34.94,59.705 C37A.1@35.052,59.817 35.052,60.698 35.433,61.079 v2(35.433,61.087) 35.374,61.146 35.374,61.235 R9.1@33.744,62.865 ; v2(37.084,8.509) 37.11,8.535 37.718,8.535 ; U4C.3@37.543,2.108 U4C.3@37.716,2.281 37.716,2.966 38.735,3.985 38.735,5.517 37.716,6.536 U4C.6@37.716,7.221 U4C.6@37.716,7.221 37.718,8.535 ; U4B.3@37.719,9.849 37.718,9.848 37.718,8.535 ; 17.634,62.144 17.634,62.169
  Top Layer w0.5: v2(8.509,5.969) 8.52,5.958 8.52,5.618 9.25,4.888 S1.1@9.25,4.488 ; v2(11.557,56.642) v2@11.562,56.647 ; R18.2@12.516,56.647 R18.2@12.521,56.653 ; v2(23.072,68.027) 23.088,68.027 23.111,68.049 23.624,68.049 23.749,68.174 LD2.1@23.749,68.199 ; v2(24.384,3.556) 24.384,4.826 24.677,5.119 25.439,5.119 C34D.1@25.654,5.334 25.654,7.747 26.67,8.763 29.21,8.763 29.714,8.259 29.714,7.046 U4D.6@29.718,7.042 U4D.3@29.718,2.102 ; C37C.1@24.765,37.084 v2(24.765,35.941) v2(25.527,35.941) ; R4.1@32.042,53.594 32.158,53.478 32.882,53.478 v2(32.893,53.467) ; v2(32.639,5.588) C34C.1@33.604,5.588 ; C34C.1@33.655,5.537 33.655,6.715 33.782,6.842 v2(33.782,6.858)
  Power w0.254: 17.526,65.866 17.653,65.739 ; 32.258,61.658 32.322,61.595
  Power w0.3: v2@11.531,56.668 v2(11.557,56.642)
  Power w0.4: 5.588,57.472 11.108,57.472 11.531,57.049 v2@11.531,56.668 ; v2(17.653,64.897) 17.653,65.739 ; v2(21.59,65.405) 21.59,67.815 ; v2(25.019,65) 25.376,64.643 27.135,64.643 27.389,64.897 v2(27.432,64.897) 27.432,67.815 ; 32.322,61.595 34.925,61.595 v2(35.433,61.087) ; v2(33.782,6.858) 35.433,8.509 v2(37.084,8.509)
  Power w0.5: v2(8.509,5.969) 8.498,5.958 8.078,5.958 6.731,4.611 6.731,4.318 ; v2(12.446,43.942) 12.435,43.931 11.419,43.931 10.795,43.307 5.842,43.307 5.588,43.053 ; v2@12.7,24.447 v2@12.7,25.082 ; v2(12.7,25.146) v2(12.7,25.781) 12.684,25.781 12.43,26.035 v2(6.858,26.035) ; v2@17.716,1.143 v2(17.399,1.143) 8.763,1.143 6.731,3.175 6.731,4.318 ; 21.847,68.06 23.022,68.06 23.056,68.027 v2(23.072,68.027) 30.779,68.027 32.258,66.548 32.258,61.658 32.258,56.364 33.885,54.737 ; 21.847,68.072 20.251,68.072 18.045,65.866 17.526,65.866 9.309,65.866 9.262,65.913 6.731,65.913 5.588,64.77 5.588,57.472 5.588,43.053 ; v2(22.225,18.161) 26.289,22.225 30.231,22.225 v2(31.447,23.441) 31.447,27.383 36.576,32.512 36.576,36.576 ; v2(24.384,3.556) 24.4,3.556 24.616,3.34 25.057,3.34 26.035,4.318 26.035,5.588 27.432,6.985 29.337,6.985 30.696,5.626 v2@32.639,5.626 ; v2@25.527,44.577 v2(26.162,44.577) 26.173,44.566 26.173,43.931 26.416,43.688 26.416,41.275 24.765,39.624 v2(24.765,35.941) v2(25.527,35.941) 25.543,35.941 26.178,36.576 36.576,36.576 ; v2(32.893,53.467) 32.904,53.478 32.974,53.478 34.049,54.554 ; 33.955,54.648 34.049,54.554 ; 5.588,43.053 v2(5.588,41.275) 5.588,27.686 6.858,26.416 v2(6.858,26.035) ; 6.731,4.318 5.461,5.588 v2(5.461,12.7) 5.461,23.749 6.858,25.146 v2(6.858,26.035) ; 34.049,54.554 35.594,53.009 v2(35.594,48.423) 36.071,47.946 36.071,40.874 36.079,40.866 36.079,40.111 36.576,39.614 v2(36.576,38.1) 36.576,36.576
  Bottom Layer w0.5: v2(17.399,1.143) v2(17.907,1.143) 23.114,1.143 24.384,2.413 v2(24.384,3.556) ; v2@25.5,44.577 v2(26.162,44.577) ; v2(32.639,5.588) 32.639,10.112 32.893,10.366 v2(32.893,10.414)
  other v2: 12.7,24.511
+5V: C10.1 C11.1 C22.1 C23.2 C40.2 C41.2 D1.1 J1.A4_B9 J1.B4_A9 L1.2 R8.1 R14.1 S1.3 U2.1 | length 109.3
  Top Layer w0.3: v2(7.366,60.071) v2@7.366,60.339 ; C40.2@9.779,61.112 9.779,60.833 C40.2@10.033,60.833 ; J1.A4_B9@13.745,63.402 J1.A4_B9@13.83,63.068
  Top Layer w0.381: R8.1@9.652,31.712 9.745,31.619 R8.1@9.745,31.427 ; v2(9.779,30.734) 9.745,30.768 R8.1@9.745,31.427 ; R14.1@9.995,20.701 9.441,21.255 9.417,21.255 8.636,22.036 8.636,30.734 9.329,31.427 R8.1@9.745,31.427 ; v2(12.455,32.015) 12.49,32.05 13,32.05 13.733,32.783 13.733,33.641 U2.1@13.777,33.685
  Top Layer w0.4: J1.B4_A9@9.03,63.068 9.13,63.168 9.13,63.806 9.349,64.025 9.349,64.806 9.583,65.04 13.073,65.04 13.33,64.782 13.682,63.784 13.73,63.438 J1.A4_B9@13.762,63.419
  Top Layer w0.5: v2@7.306,60.117 v2(7.765,59.659) ; v2@7.366,60.339 7.831,60.804 8.734,60.804 C41.2@8.763,60.833 C40.2@9.779,60.833 ; J1.B4_A9@9.03,63.068 9.03,61.861 C40.2@9.779,61.112 ; v2(11.049,5.461) 11.049,2.159 11.557,1.651 13.679,1.651 13.972,1.944 13.972,3.046 13.97,3.048 13.97,3.695 13.85,3.815 13.85,4.388 S1.3@13.75,4.488
  Power w0.381: v2(9.779,30.734) 11.06,32.015 v2(12.455,32.015)
  Power w0.5: v2(7.366,60.071) 8.001,59.436 10.922,59.436 12.573,57.785 12.573,52.07 13.716,50.927 13.716,48.641 14.478,47.879 16.764,47.879 18.415,46.228 18.415,44.069 17.526,43.18 16.002,43.18 12.954,40.132 v2@12.954,38.227 ; v2(11.049,5.461) 12.065,6.477 12.065,17.78 14.097,19.812 14.097,26.924 13.202,27.819 13.202,37.303 12.93,37.576 v2(12.93,37.592) ; v2(12.93,38.227) 12.93,37.616 v2@12.954,37.592
An_3V3: C5.2 C6.2 FB1.1 U1.20 U1.21 | length 6.6
  Top Layer w0.254: U1.21@20.466,55.606 20.466,57.804 C6.2@20.701,58.039 C5.2@20.701,59.309 21.611,59.309 22.471,58.449 FB1.1@22.606,58.449 ; U1.21@20.467,55.605 U1.20@20.967,55.605
ASENSE_M: C39D.2 D3D.1 R23D.2 U1.15 | length 13.8
  Top Layer w0.254: U1.15@23.467,55.605 23.48,55.618 23.48,56.568 23.576,56.664 23.576,56.681 23.819,56.924 v2(23.819,57.007) ; D3D.1@24.892,62.653 24.892,62.646 24.965,62.573 R23D.2@26.289,62.573 26.581,62.281 26.581,60.49 C39D.2@26.924,60.147 27.264,60.487 27.264,61.3 v2(27.305,61.341)
  Bottom Layer w0.254: v2(23.819,57.007) 23.878,56.949 24.089,56.949 24.121,56.916 25.293,56.916 27.051,58.674 27.051,61.039 27.305,61.293 v2(27.305,61.341)
BOOT: R1.1 U1.45 | length 7
  Top Layer w0.254: R1.1@18.717,43.59 19.525,44.399 20.829,44.399 21.304,44.873 22.648,44.873 22.987,45.212 22.987,46.132 22.98,46.139 22.98,47.252 U1.45@22.967,47.265
BSENSE_M: C39C.2 D3C.1 R23C.2 U1.16 | length 13.8
  Top Layer w0.254: D3C.1@21.971,62.653 21.971,62.646 22.044,62.573 R23C.2@23.495,62.573 23.776,62.292 24.195,62.292 25.306,61.181 25.306,60.495 C39C.2@25.654,60.147 25.781,60.274 v2(25.781,61.468) ; U1.16@22.967,55.605 22.98,55.618 22.98,56.858 v2(23.017,56.895)
  Bottom Layer w0.254: v2(23.017,56.895) 23.017,56.954 23.26,57.197 23.26,57.239 24.061,58.039 24.568,58.039 25.781,59.252 v2(25.781,61.468)
BST_A: C24.1 U3.48 | length 3.4
  Top Layer w0.254: U3.48@23.679,17.748 25.622,17.748 26.104,18.23 26.449,18.23 26.737,18.517 C24.1@26.737,18.542
BST_B: C27.1 U3.43 | length 3.1
  Top Layer w0.308: U3.43@23.686,15.241 C27.1@26.745,15.241
  Top Layer w0.381: C27.1@26.745,15.241 C27.1@26.797,15.189
BST_C: C29.1 U3.38 | length 3.5
  Top Layer w0.308: U3.38@23.679,12.748 25.86,12.748 26.487,12.121 26.512,12.121 26.797,11.836 C29.1@26.797,11.811
COMP: C16.2 R15.1 U3.2 | length 7
  Top Layer w0.254: R15.1@11.614,23.641 11.614,23.603 13.969,21.248 U3.2@16.129,21.248
  Top Layer w0.381: R15.1@11.614,23.641 11.614,25.127 C16.2@11.633,25.146
CSENSE_M: C39B.2 D3B.1 R23B.2 U1.17 | length 14.5
  Top Layer w0.254: D3B.1@18.669,62.907 19.986,62.907 R23B.2@20.32,62.573 21.298,61.595 22.936,61.595 24.011,60.52 24.036,60.52 24.384,60.172 C39B.2@24.384,60.147 v2(24.384,61.214) ; v2(22.305,56.871) 22.305,56.788 22.454,56.639 22.454,55.618 U1.17@22.467,55.605
  Bottom Layer w0.254: v2(22.305,56.871) 22.305,58.213 22.288,58.229 24.384,60.325 24.406,60.325 24.406,61.192 v2(24.384,61.214)
D_N: J1.A7 J1.B7 R27.1 | length 19.4
  Top Layer w0.254: J1.A7@11.176,63.222 11.176,63.484 11.203,63.511 11.203,63.706 11.414,63.917 11.946,63.917 12.157,63.706 12.157,63.511 12.168,63.5 J1.B7@12.177,63.5
  Top Layer w0.3: v2(11.811,61.468) 11.811,61.516 12.187,61.893 12.187,63.061 J1.B7@12.18,63.068
  Top Layer w0.381: v2(10.922,47.752) 11.049,47.752 11.106,47.695 11.712,47.695 11.716,47.691 12.469,47.691 R27.1@12.535,47.625
  Bottom Layer w0.381: v2(10.922,47.752) 10.884,47.79 10.884,56.849 11.761,57.727 11.761,61.292 11.811,61.341 v2(11.811,61.468)
D_P: J1.A6 J1.B6 R26.1 | length 21
  Top Layer w0.3: J1.B6@10.68,63.068 10.687,63.06 10.687,62.033 v2@11.067,61.653 ; v2(11.067,61.605) v2@11.067,61.653 ; J1.A6@11.68,63.068 11.68,62.266 v2@11.067,61.653
  Top Layer w0.381: v2(10.21,47.752) 10.21,47.019 11.255,45.974 R26.1@12.535,45.974
  Bottom Layer w0.381: v2(10.21,47.752) 10.21,47.879 10.249,47.917 10.249,57.112 11.126,57.99 11.126,61.546 v2(11.067,61.605)
EN_GATE: U1.26 U3.16 | length 47.3
  Top Layer w0.2: v2(14.351,13.97) 14.405,13.97 14.648,14.213 16.094,14.213 U3.16@16.129,14.248 ; U1.26@17.547,53.685 19.322,53.685 19.794,53.213 v2(19.812,53.213)
  Bottom Layer w0.2: v2(14.351,13.97) 13.573,13.97 13.208,14.335 13.208,18.923 16.486,22.201 16.486,39.473 18.518,41.505 18.518,49.74 19.866,51.088 19.866,53.159 v2(19.812,53.213)
EN_LDO: R8.2 U2.3 | length 4.7
  Top Layer w0.381: R8.2@9.652,33.312 v2(9.652,34.163) ; v2(11.811,32.766) 11.844,32.799 11.844,33.652 U2.3@11.877,33.685
  Power w0.381: v2(9.652,34.163) 10.668,34.163 11.049,33.782 11.049,33.528 v2(11.811,32.766)
F_SW: U1.18 U5A.4 U5B.4 U5C.4 U5D.4 | length 52
  Top Layer w0.2: U1.18@21.967,55.605 21.949,55.623 21.949,56.475 21.773,56.651 21.773,57.079 21.773,57.091 22.221,57.539 28.898,57.539 29.205,57.846 30.424,57.846 30.523,57.945 32.744,57.945 33.204,58.405 U5A.4@33.599,58.405 33.944,58.405 34.044,58.305 34.044,57.777 34.669,57.152 v2(35.435,57.152) ; v2(25.672,38.989) 25.738,38.923 26.101,38.923 26.218,38.806 U5C.4@26.218,38.369 ; v2(25.678,42.291) 25.726,42.338 25.726,42.714 25.826,42.814 U5D.4@26.218,42.814 ; v2(35.23,39.624) 35.251,39.624 35.871,40.244 U5B.4@36.266,40.244
  Power w0.2: v2(25.672,38.989) 26.688,37.973 34.173,37.973 35.23,39.03 v2(35.23,39.624)
  Bottom Layer w0.2: v2(25.672,38.989) 25.675,38.992 25.675,42.288 v2(25.678,42.291) ; v2(35.23,39.624) 35.23,39.721 35.062,39.89 35.062,56.705 35.435,57.078 v2(35.435,57.152)
GH_A: R11A.1 U3.47 | length 32.8
  Top Layer w0.305: U3.47@23.679,17.248 25.548,17.248 25.604,17.192 v1(25.673,17.192)
  Top Layer w0.5: R11A.1@45.212,26.205 45.462,25.955 45.541,25.955 45.541,25.323 45.834,25.03 46.471,25.03 v2(46.482,25.019)
  GND w0.5: v1(25.673,17.192) 26.195,17.192 ccw(c26.195,18.683) 27.686,18.683 27.686,23.622 cw(c30.226,23.622) 30.226,26.162 45.339,26.162 cw(c45.339,25.019) v2(46.482,25.019)
GH_B: R11B.1 U3.42 | length 44.4
  Top Layer w0.305: U3.42@23.679,14.748 25.504,14.748 25.607,14.645 v1(25.676,14.645)
  Top Layer w0.5: R11B.1@55.753,26.205 57.234,26.205 v2(58.166,25.273)
  GND w0.5: v1(25.676,14.645) 29.083,14.645 ccw(c29.083,17.185) 31.623,17.185 cw(c33.629,17.523) 33.629,19.558 51.816,19.558 ccw(c51.816,21.209) 53.467,21.209 53.467,23.241 cw(c55.245,23.241) 55.245,25.019 57.896,25.019 58.15,25.273 v2(58.166,25.273)
GH_C: R11C.1 U3.37 | length 55
  Top Layer w0.305: U3.37@23.679,12.248 25.157,12.248 25.594,11.811 v1(25.654,11.811)
  Top Layer w0.5: v2(67.31,24.892) 67.31,24.908 67.437,25.035 R11C.1@67.437,26.078
  GND w0.5: v1(25.654,11.811) 31.75,11.811 ccw(c31.75,12.827) 32.766,12.827 cw(c34.417,12.827) 34.417,14.478 61.595,14.478 ccw(c61.595,17.018) 64.135,17.018 64.135,22.733 cw(c66.294,22.733) 66.294,24.892 v2(67.31,24.892)
GL_A: R13A.1 U3.45 | length 15.5
  Top Layer w0.305: U3.45@23.679,16.248 24.786,16.248 25.045,15.99 25.605,15.99 v1(25.654,15.941) ; R13A.1@36.322,19.388 cw(c36.365,19.388) R13A.1@36.365,19.431
  Top Layer w0.5: v2(36.322,18.034) R13A.1@36.322,19.388
  Power w0.5: v1(25.654,15.941) 34.483,15.941 ccw(c34.483,17.78) 36.322,17.78 v2(36.322,18.034)
GL_B: R13B.1 U3.40 | length 27.7
  Top Layer w0.305: U3.40@23.679,13.748 24.71,13.748 25.065,13.393 25.596,13.393 v1(25.654,13.335) ; R13B.1@47.795,19.334 R13B.1@47.795,19.431
  Top Layer w0.5: v2(46.674,18.213) ccw(c46.674,19.334) R13B.1@47.795,19.334
  Power w0.5: v1(25.654,13.335) 25.781,13.335 ccw(c25.781,14.351) 26.797,14.351 cw(c27.323,14.351) 27.323,14.877 32.456,14.877 37.908,15.349 37.911,15.349 ccw(c37.792,16.698) 38.738,15.729 ccw(c38.388,16.086) 38.761,15.753 ccw(c37.605,16.776) 38.763,15.755 ccw(c37.605,16.776) 39.148,16.776 ccw(c35.572,17.222) 39.175,17.148 39.223,17.42 cw(c39.716,17.333) 39.316,17.633 cw(c40.478,16.759) 40.478,18.213 v2(46.674,18.213)
GL_C: R13C.1 U3.35 | length 41.2
  Top Layer w0.305: U3.35@23.679,11.248 23.681,11.245 24.412,11.245 24.634,11.024 24.634,10.926 v1(25.654,9.906) ; R13C.1@58.928,19.261 cw(c58.971,19.261) R13C.1@58.971,19.304
  Top Layer w0.5: v2(58.928,17.907) R13C.1@58.928,19.261
  Power w0.5: v1(25.654,9.906) 26.723,9.906 ccw(c26.723,11.412) 28.229,11.412 cw(c29.517,11.412) 29.517,12.7 31.805,12.7 39.626,14.084 40.627,14.084 ccw(c40.627,15.24) 41.783,15.24 cw(c42.418,15.24) 42.418,15.875 51.562,15.875 ccw(c51.562,17.145) 52.832,17.145 cw(c53.594,17.145) 53.594,17.907 v2(58.928,17.907)
GND: C1.2 C2.2 C3.2 C4.2 C5.1 C6.1 C7.2 C8.1 C9.2 C10.2 C11.2 C12.2 C13.1 C14A.1 C14B.1 C14C.1 C15A.1 C15B.1 C15C.1 C16.1 C17.1 C18.1 C19.1 C20.1 C22.2 C23.1 C25.1 C26.1 C30.1 C31.1 C32.1 C33.1 C34A.2 C34B.2 C34C.2 C34D.2 C36A.2 C36B.2 C36C.2 C36D.2 C37A.2 C37B.2 C37C.2 C37D.2 C38A.2 C38B.2 C38C.2 C38D.2 C39A.1 C39B.1 C39C.1 C39D.1 C40.1 C41.1 C42.2 C43.2 D1.2 D2.1 J1.A1_B12 J1.B1_A12 J1.S1 J1.S2 J1.S3 J1.S4 J3.1 J4.1 J4.5 J5.1 J5.4 J7.3 J7.5 J9.2 J9.5 Q2A.1 Q2A.2 Q2A.3 Q2B.1 Q2B.2 Q2B.3 Q2C.1 Q2C.2 Q2C.3 R1.2 R16.2 R17.1 R20.1 R24A.2 R24B.2 R24C.2 R24D.2 R25.2 R28.2 R30.2 RT1.1 S1.SH U1.19 U1.23 U1.35 U1.47 U2.2 U2.4 U3.28 U3.30 U3.31 U3.32 U3.33 U3.34 U3.39 U3.44 U3.57 U4A.2 U4A.7 U4B.2 U4B.7 U4C.2 U4C.7 U4D.2 U4D.7 U5A.3 U5B.3 U5C.3 U5D.3 Y1.2 | length 54.4
  Top Layer w0.4: C9.2@10.525,28.448 C9.2@10.271,28.702 10.271,28.175 C9.2@10.741,27.705 ; v2(27.34,51.104) 27.371,51.135 27.977,51.135 28.151,51.308 28.237,51.308 28.637,51.708 28.749,51.708 v2(28.78,51.738) ; v2(27.432,49.784) v2(28.045,49.784) 28.194,49.635 v2(28.194,49.276) v2(28.194,48.641) v2(28.194,48.006) v2(28.194,47.371) v2(28.956,47.371) v2(29.718,47.371) v2(30.48,47.371) v2(31.242,47.371) v2(32.004,47.371) v2(32.766,47.371) ; v2@28.78,51.812 28.81,51.812 28.832,51.834 28.832,51.863 28.98,52.011 29.405,52.011 v2(29.464,52.07) v2(30.226,52.07) v2(30.988,52.07) v2(31.75,52.07) v2(32.512,52.07) v2(32.512,51.181) ; Y1.2@31.305,50.707 31.601,51.003 32.291,51.003 32.469,51.181 v2(32.512,51.181) ; U4A.2@31.877,25.47 31.977,25.37 31.977,24.685 32.989,23.673 32.989,23.061 v1(33.02,23.03) ; v2(32.512,48.768) v2(32.512,49.657) v2(32.512,50.419) v2(32.512,51.181) ; v4(37.465,30.099) 36.922,30.099 36.542,30.479 C15A.1@36.542,30.995 ; v4(37.465,30.734) 36.803,30.734 C15A.1@36.542,30.995 ; v4(37.465,31.496) 36.922,31.496 36.542,31.116 C15A.1@36.542,30.995 ; v4(38.227,26.924) 36.922,26.924 36.542,27.304 C14A.1@36.542,27.312 ; v4(38.227,27.559) 36.79,27.559 C14A.1@36.542,27.312 ; v4(38.227,28.194) 36.922,28.194 36.542,27.814 C14A.1@36.542,27.312 ; v4(48.26,26.924) 47.717,26.924 47.337,27.304 C14B.1@47.337,27.312 ; v4(48.26,27.559) 47.585,27.559 C14B.1@47.337,27.312 ; v4(48.26,28.194) 47.717,28.194 47.337,27.814 C14B.1@47.337,27.312 ; v4(48.26,30.353) 47.717,30.353 47.337,30.733 C15B.1@47.337,30.995 ; v4(48.26,30.988) 47.344,30.988 C15B.1@47.337,30.995 ; v4(48.26,31.75) 47.717,31.75 47.337,31.37 C15B.1@47.337,30.995 ; RT1.1@49.63,17.653 49.645,17.653 50.25,18.258 50.516,18.258 v1(50.546,18.288) ; v4(59.944,27.051) 59.274,27.051 58.894,27.431 C14C.1@58.894,27.566 ; v4(59.944,27.686) 59.015,27.686 C14C.1@58.894,27.566 ; v4(59.944,28.321) 59.274,28.321 58.894,27.941 C14C.1@58.894,27.566 ; v4(59.944,30.48) 59.274,30.48 58.894,30.86 C15C.1@58.894,31.249 ; v4(59.944,31.115) 59.028,31.115 C15C.1@58.894,31.249 ; v4(59.944,31.877) 59.274,31.877 58.894,31.497 C15C.1@58.894,31.249
  Top Layer w0.5: C9.2@10.271,28.702 10.525,28.956 v2(11.43,28.956) ; C9.2@10.525,28.448 v2(11.43,28.448) ; C9.2@10.741,27.705 10.975,27.938 11.428,27.938 v2(11.43,27.94)
  Bottom Layer w0.4: v1(50.417,20.701) 50.417,20.658 50.546,20.529 v1(50.546,18.288)
  other v1: 18.923,3.556 18.923,4.318 18.923,5.207 10.033,6.858 16.891,6.985 17.653,6.985 10.033,7.62 18.669,9.144 19.232,9.144 19.796,9.144 20.359,9.144 20.923,9.144 18.669,9.707 19.232,9.708 19.796,9.708 20.359,9.708 20.923,9.708 18.669,10.271 19.232,10.271 19.796,10.271 20.359,10.271 20.923,10.271 2.794,10.287 18.669,10.834 19.232,10.834 19.796,10.835 20.359,10.835 20.923,10.835 37.086,12.942 37.689,13.012 18.812,13.986 19.376,13.986 19.939,13.986 20.503,13.986 21.066,13.986 9.144,14.224 18.812,14.549 19.376,14.549 19.939,14.55 20.503,14.55 21.066,14.55 2.667,14.732 18.812,15.113 19.376,15.113 19.939,15.113 20.502,15.113 21.066,15.113 9.144,15.621 18.812,15.676 19.375,15.676 19.939,15.676 20.502,15.677 21.066,15.677 36.449,16.129 36.946,16.118 18.812,16.24 19.375,16.24 19.939,16.24 20.502,16.24 21.066,16.24 9.144,17.018 33.923,17.032 33.528,17.526 33.528,18.288 58.42,20.574 58.97,20.574 59.52,20.574 60.07,20.574 60.62,20.574 61.17,20.574 61.72,20.574 33.528,20.701 47.117,20.701 47.667,20.701 48.217,20.701 48.767,20.701 49.317,20.701 49.867,20.701 35.837,20.824 36.364,20.824 36.914,20.824 37.464,20.824 38.014,20.824 38.564,20.824 39.114,20.824 58.42,21.088 58.97,21.088 59.52,21.088 60.07,21.088 60.62,21.088 61.17,21.088 61.72,21.088 2.794,21.209 47.117,21.215 47.667,21.215 48.217,21.215 48.767,21.215 49.317,21.215 49.867,21.215 50.417,21.215 33.528,21.336 35.837,21.338 36.364,21.338 36.914,21.338 37.464,21.338 38.014,21.338 38.564,21.338 39.114,21.338 58.42,21.638 58.97,21.638 59.52,21.638 60.07,21.638 60.62,21.638 61.17,21.638 61.72,21.638 47.117,21.765 47.667,21.765 48.217,21.765 48.767,21.765 49.317,21.765 49.867,21.765 50.417,21.765 35.837,21.888 36.364,21.888 36.914,21.888 37.464,21.888 38.014,21.888 38.564,21.888 39.114,21.888 58.42,22.188 58.97,22.188 59.52,22.188 60.07,22.188 60.62,22.188 61.17,22.188 61.72,22.188 47.117,22.315 47.667,22.315 48.217,22.315 48.767,22.315 49.317,22.315 49.867,22.315 50.417,22.315 35.837,22.438 36.364,22.438 36.914,22.438 37.464,22.438 38.014,22.438 38.564,22.438 39.114,22.438 17.145,22.733 58.42,22.738 58.97,22.738 59.52,22.738 60.07,22.738 60.62,22.738 61.17,22.738 61.72,22.738 47.117,22.865 47.667,22.865 48.217,22.865 48.767,22.865 49.317,22.865 49.867,22.865 50.417,22.865 35.837,22.988 36.364,22.988 36.914,22.988 37.464,22.988 38.014,22.988 38.564,22.988 39.114,22.988 58.42,23.288 58.97,23.288 59.52,23.288 60.07,23.288 60.62,23.288 61.17,23.288 61.72,23.288 47.117,23.415 47.667,23.415 48.217,23.415 48.767,23.415 49.317,23.415 49.867,23.415 50.417,23.415 35.837,23.538 36.364,23.538 36.914,23.538 37.464,23.538 38.014,23.538 38.564,23.538 39.114,23.538 2.667,23.622 17.145,23.622 58.42,23.838 58.97,23.838 59.52,23.838 60.07,23.838 60.62,23.838 61.17,23.838 61.72,23.838 47.117,23.965 47.667,23.965 48.217,23.965 48.767,23.965 49.317,23.965 49.867,23.965 50.417,23.965 35.837,24.088 36.364,24.088 36.914,24.088 37.464,24.088 38.014,24.088 38.564,24.088 39.114,24.088 58.42,24.388 58.97,24.388 59.52,24.388 60.07,24.388 60.62,24.388 61.17,24.388 61.72,24.388 47.117,24.515 47.667,24.515 48.217,24.515 48.767,24.515 49.317,24.515 49.867,24.515 50.417,24.515 35.837,24.638 36.364,24.638 36.914,24.638 37.464,24.638 38.014,24.638 38.564,24.638 39.114,24.638 17.145,25.146 17.145,28.321 27.051,29.337 2.667,30.099 31.75,31.242 2.794,34.544 28.956,35.433 2.921,36.957 2.921,39.497 33.147,43.307 33.147,43.942 3.048,45.72 3.048,48.133 22.479,48.641 3.048,50.673 22.266,53.752 22.352,54.356 16.256,55.245 29.464,56.007 15.367,58.547 7.747,58.674 3.048,58.928 27.743,59.295 31.369,60.452